# Allegro board FSCV_V2.brd
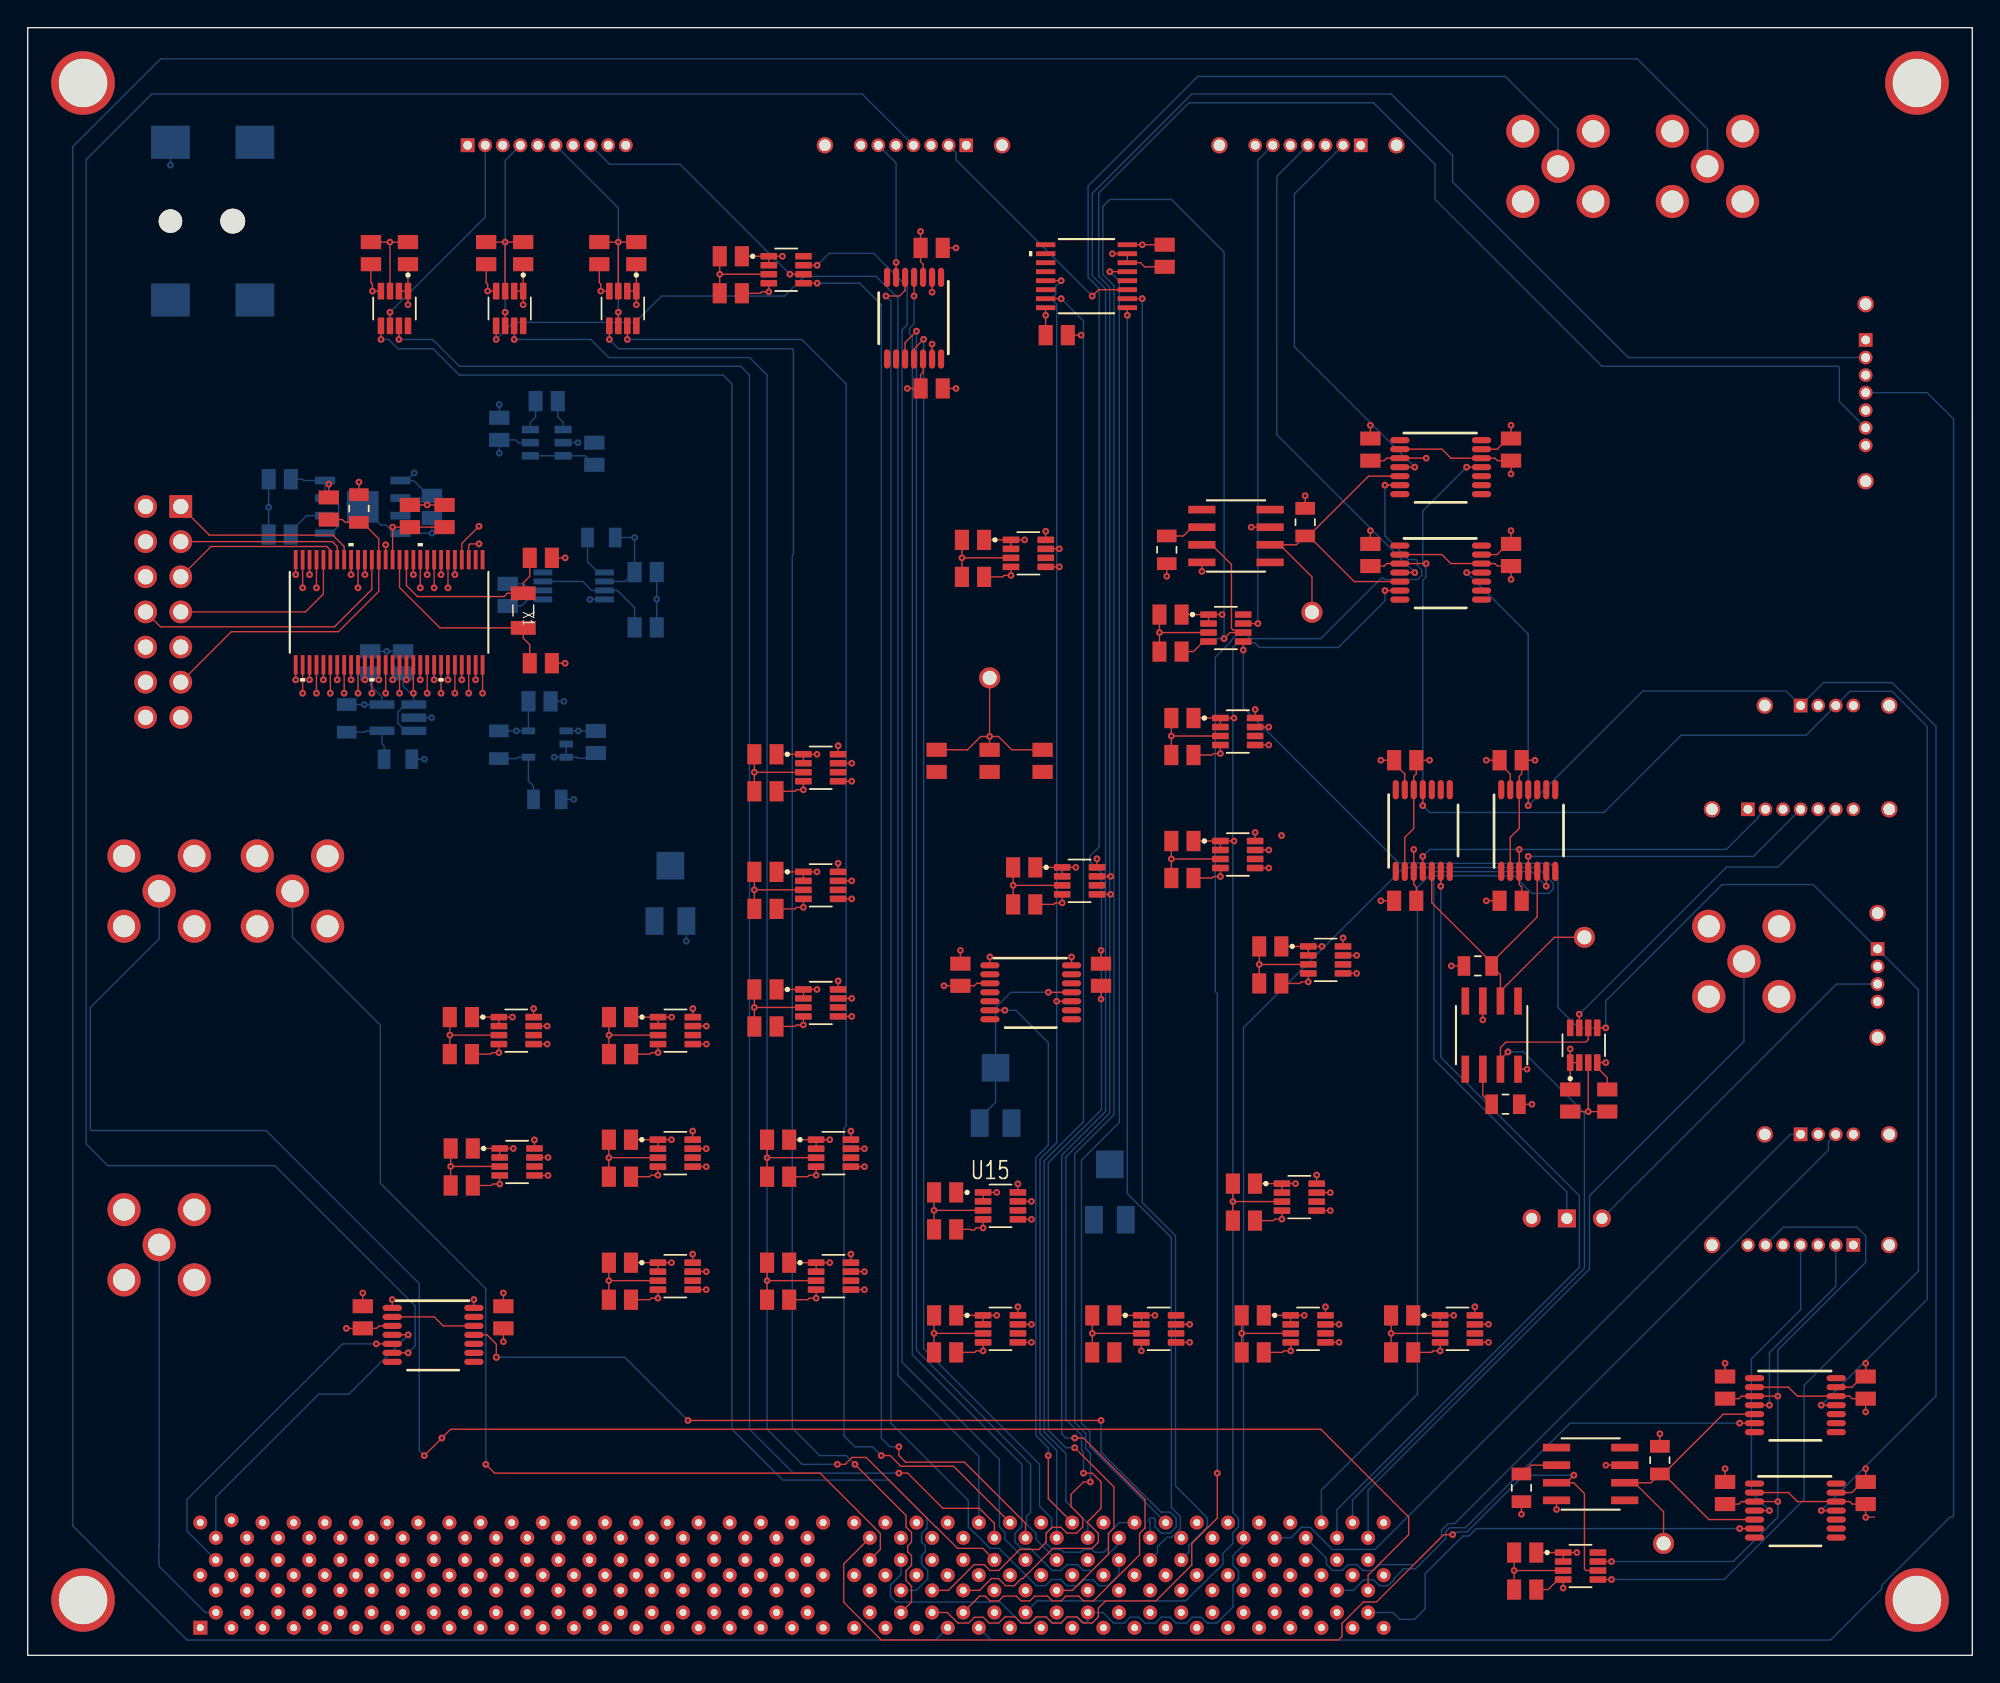
[diagram p0: board, top side]
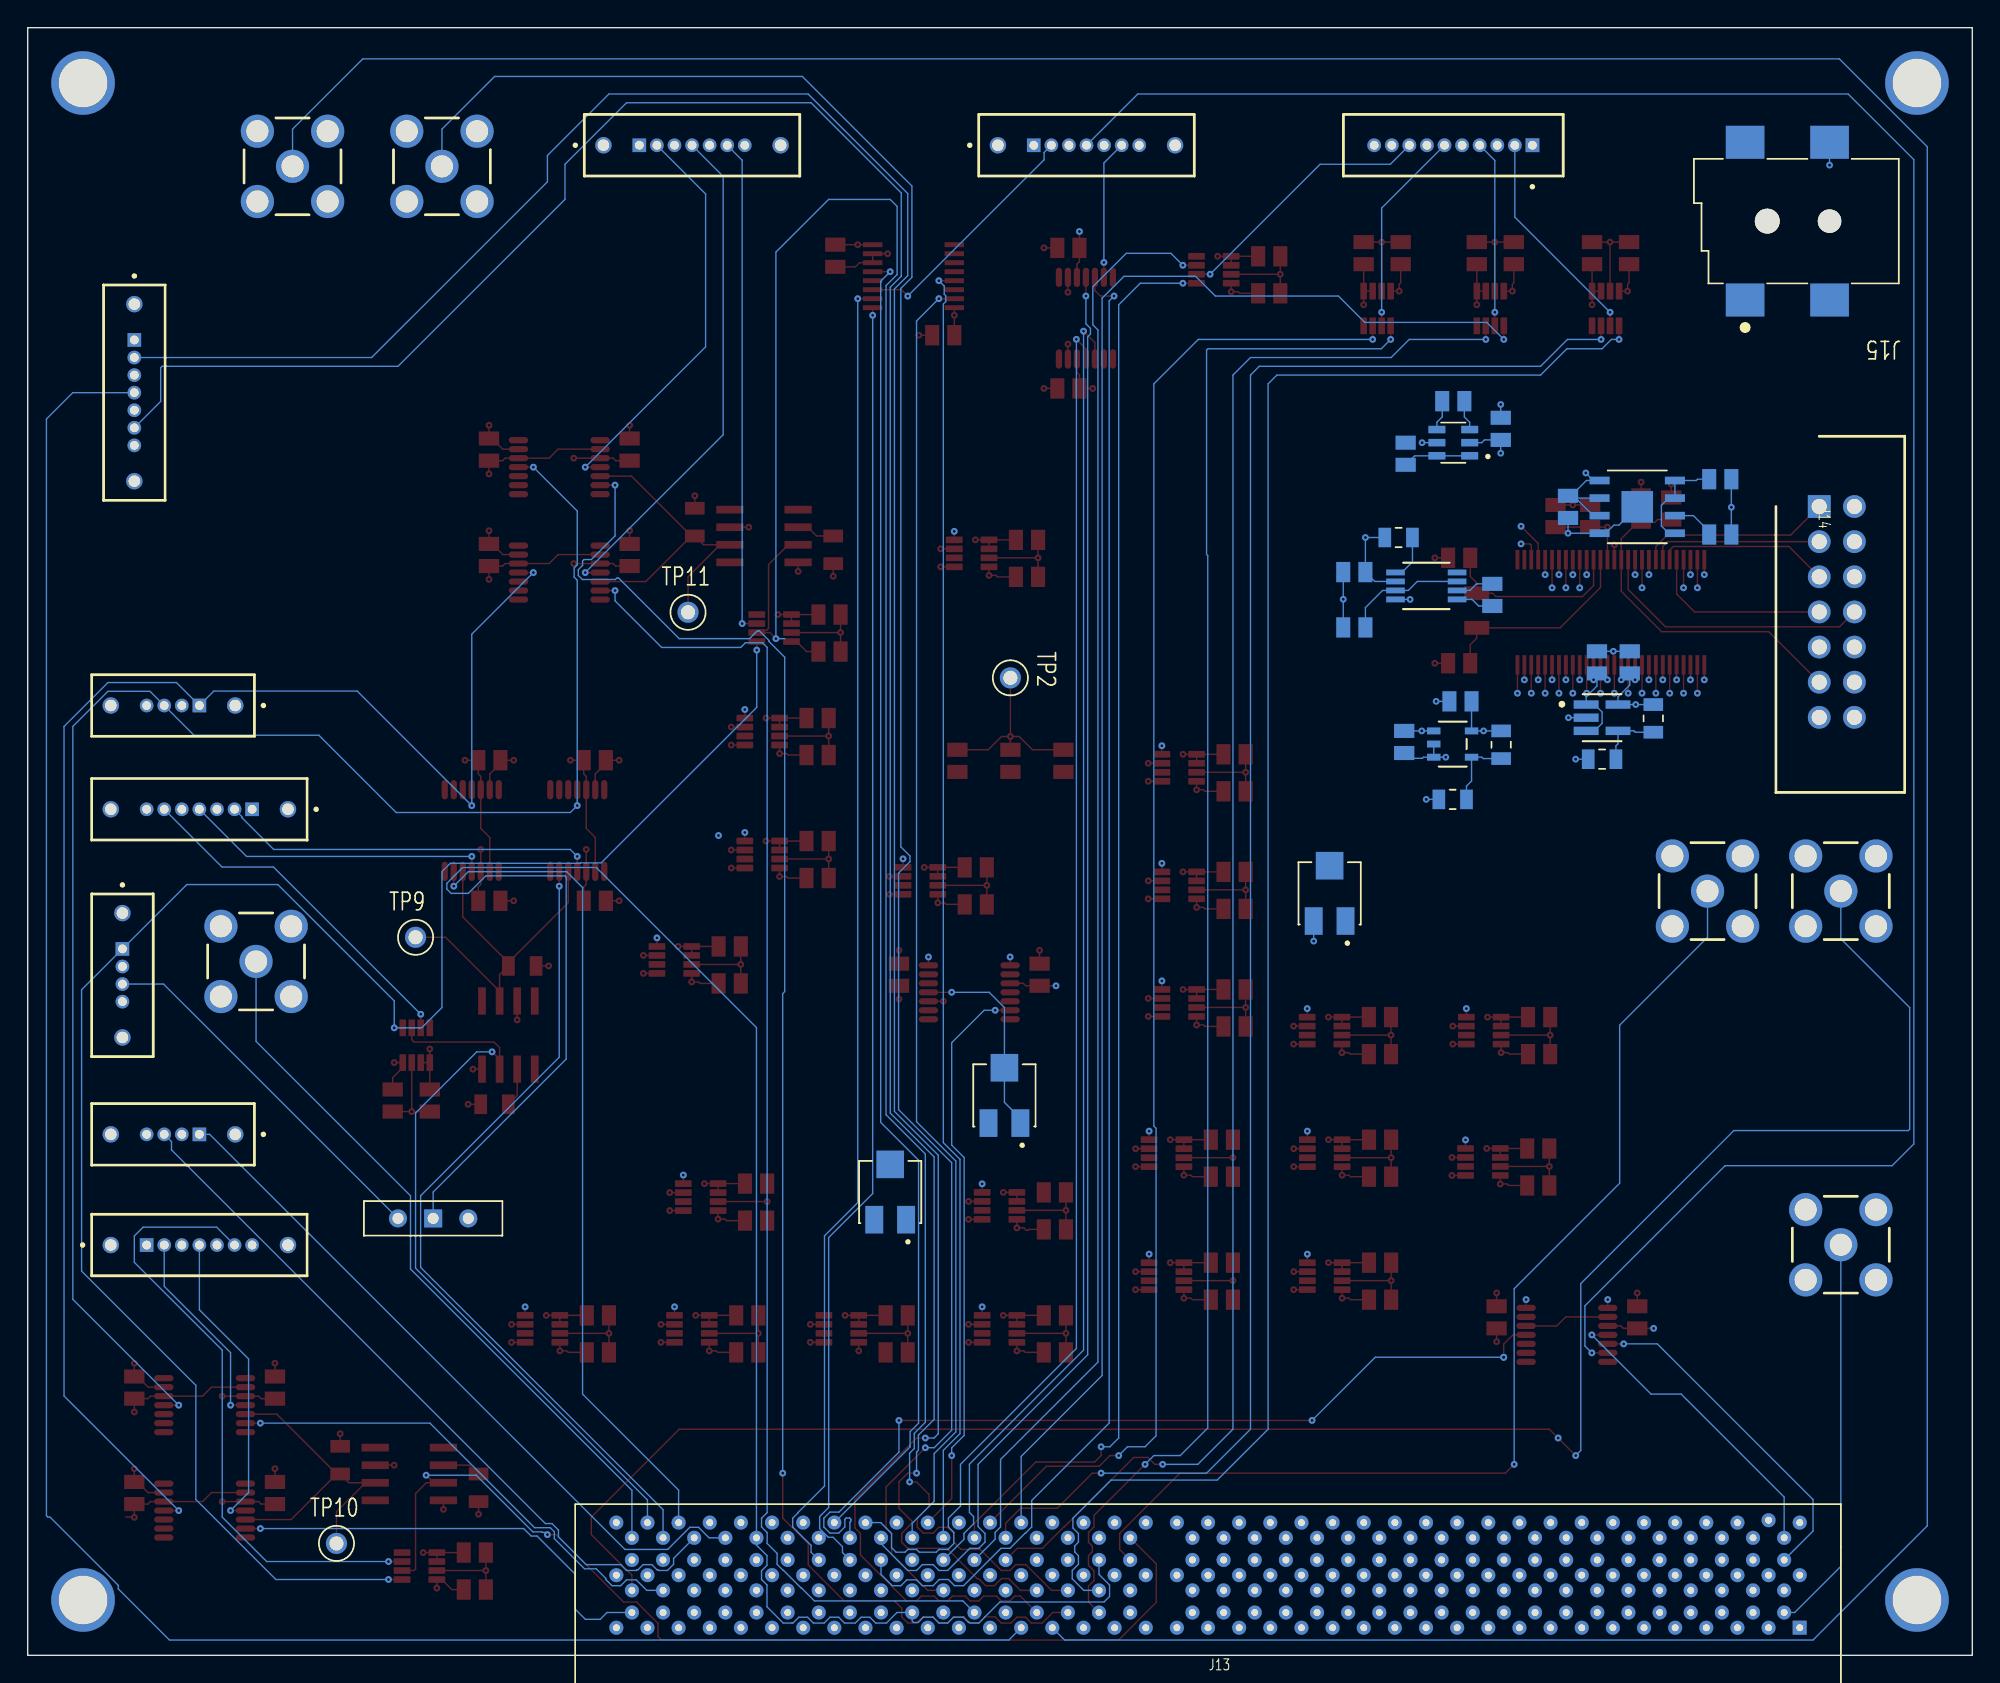
[diagram p1: board, bottom side, seen from below]

Outline 140.5 x 117.66 mm; copper layers: TOP, GND, TRACE, BOTTOM. Coordinates in mm from the lower left corner of the outline.
Outline path: rectangle 0,0 140.5,117.66

## Design rules (mm)
constraint set DEFAULT: min track width 0.127
net group ANALOG: nets SNFET_2_VD SNFET_4_VD SNFET_SHARED_VS VRPS_D
net group DIGITAL: nets CH_EN_1 CH_EN_2 CH_EN_5 CH_EN_D COND_EN_1 COND_EN_2 COND_EN_5 COND_EN_D HP_BYPASS_EN_1 HP_BYPASS_EN_2 HP_BYPASS_EN_5 HP_BYPASS_EN_D IREF_EN_12 IREF_EN_56 IREF_EN_D IREF_TEST_12 IREF_TEST_56 IREF_TEST_D TEST_EN_D VDD_12 VDD_56 VDD_D
net group MCU: nets RST TCK TDI TDO TEST TMS XIN XOUT
net group MISC: nets N162422
net group POWER: nets 3.3V +1.65V +5V -1.65V -5V
nets with their own width: min track width 0.1; nets 5V_UNREGULATED CM_EXT

## Placement (name value [footprint] x y rotation side)
C4  1.1n  [CAP0805]  21.75 82.9 270 top
C7  12p  [CAP0805]  37.07 79.34 0 top
C8  12p  [CAP0805]  37.07 71.72 0 top
C15  0.1u  [CAP0805]  53.3 56.63 180 top
C16  0.1u  [CAP0805]  53.3 53.96 0 top
C17  0.1u  [CAP0805]  88.51 24.57 180 top
C18  0.1u  [CAP0805]  88.51 21.9 0 top
C19  0.1u  [CAP0805]  54.22 37.28 180 top
C20  0.1u  [CAP0805]  54.22 34.6 0 top
C21  2.2u  [CAP0805]  18.21 85.02 180 bottom
C22  2.2u  [CAP0805]  29.21 83.02 270 bottom
C23  2.2u  [CAP0805]  18.21 81.02 180 bottom
C24  10u  [CAP0805]  44.65 74.31 0 bottom
C25  10u  [CAP0805]  44.65 78.31 0 bottom
C26  1u  [CAP0805]  34.68 76.66 270 bottom
C27  10u  [CAP0805]  40.94 86.86 90 bottom
C28  10u  [CAP0805]  34.07 88.66 90 bottom
C29  1u  [CAP0805]  37.5 90.66 0 bottom
C30  0.1u  [CAP0805]  83.43 58.87 180 top
C31  0.1u  [CAP0805]  83.43 56.19 0 top
C32  0.1u  [CAP0805]  83.43 67.75 180 top
C33  0.1u  [CAP0805]  83.43 65.08 0 top
C34  0.1u  [CAP0805]  31.36 36.64 180 top
C35  0.1u  [CAP0805]  31.36 33.97 0 top
C36  0.1u  [CAP0805]  54.22 28.38 180 top
C37  0.1u  [CAP0805]  54.22 25.71 0 top
C38  0.1u  [CAP0805]  89.78 51.25 180 top
C39  0.1u  [CAP0805]  89.78 48.57 0 top
C40  0.1u  [CAP0805]  87.88 34.1 180 top
C41  0.1u  [CAP0805]  87.88 31.42 0 top
C42  0.1u  [CAP0805]  68.3 80.63 180 top
C43  0.1u  [CAP0805]  68.3 77.96 0 top
C44  0.1u  [CAP0805]  53.3 48.13 180 top
C45  0.1u  [CAP0805]  53.3 45.46 0 top
C46  0.1u  [CAP0805]  66.29 33.47 180 top
C47  0.1u  [CAP0805]  66.29 30.79 0 top
C48  0.1u  [CAP0805]  53.3 65.13 180 top
C49  0.1u  [CAP0805]  53.3 62.46 0 top
C50  0.1u  [CAP0805]  99.31 24.57 180 top
C51  0.1u  [CAP0805]  99.31 21.9 0 top
C52  0.1u  [CAP0805]  72 56.96 180 top
C53  0.1u  [CAP0805]  72 54.28 0 top
C54  0.1u  [CAP0805]  66.29 24.57 180 top
C55  0.1u  [CAP0805]  66.29 21.9 0 top
C56  0.1u  [CAP0805]  42.79 28.38 180 top
C57  0.1u  [CAP0805]  42.79 25.71 0 top
C58  0.1u  [CAP0805]  42.79 37.28 180 top
C59  0.1u  [CAP0805]  42.79 34.6 0 top
C60  0.1u  [CAP0805]  77.71 24.57 180 top
C61  0.1u  [CAP0805]  77.71 21.9 0 top
C62  0.1u  [CAP0805]  42.8 46.13 180 top
C63  0.1u  [CAP0805]  42.8 43.46 0 top
C64  0.1u  [CAP0805]  31.3 46.13 180 top
C65  0.1u  [CAP0805]  31.3 43.46 0 top
C66  0.1u  [CAP0805]  111.45 40.1 270 top
C67  0.1u  [CAP0805]  114.12 40.1 90 top
C68  0.1u  [CAP0805]  99.52 54.54 180 top
C69  0.1u  [CAP0805]  99.52 64.7 0 top
C70  0.1u  [CAP0805]  107.14 64.7 0 top
C71  0.1u  [CAP0805]  107.14 54.54 180 top
C72  0.1u  [CAP0805]  132.8 19.35 270 top
C73  0.1u  [CAP0805]  122.63 19.35 90 top
C74  0.1u  [CAP0805]  132.8 11.73 270 top
C75  0.1u  [CAP0805]  108.19 7.43 180 top
C76  0.1u  [CAP0805]  108.19 4.75 0 top
C77  0.1u  [CAP0805]  122.63 11.73 90 top
C78  0.1u  [CAP0805]  107.17 87.16 270 top
C79  0.1u  [CAP0805]  97.01 87.16 90 top
C80  0.1u  [CAP0805]  107.17 79.54 270 top
C81  0.1u  [CAP0805]  82.57 75.23 180 top
C82  0.1u  [CAP0805]  82.57 72.56 0 top
C83  0.1u  [CAP0805]  97.01 79.54 90 top
C84  0.1u  [CAP0805]  34.37 24.44 270 top
C85  0.1u  [CAP0805]  24.21 24.44 90 top
C86  0.1u  [CAP0805]  65.31 91.58 180 top
C87  0.1u  [CAP0805]  65.31 101.74 0 top
C88  0.1u  [CAP0805]  74.35 95.43 180 top
C89  0.1u  [CAP0805]  82.15 101.17 90 top
C90  0.1u  [CAP0805]  27.47 101.36 90 top
C91  0.1u  [CAP0805]  24.8 101.36 270 top
C92  0.1u  [CAP0805]  35.8 101.36 90 top
C93  0.1u  [CAP0805]  33.12 101.36 270 top
C94  0.1u  [CAP0805]  43.97 101.36 90 top
C95  0.1u  [CAP0805]  41.3 101.36 270 top
C96  0.1u  [CAP0805]  50.8 101.13 180 top
C97  0.1u  [CAP0805]  50.8 98.46 0 top
C98  10u  [CAP0805]  27.12 71.78 90 bottom
C99  10u  [CAP0805]  24.75 71.78 90 bottom
C100  0.1u  [CAP0805]  77.55 49.2 270 top
C101  0.1u  [CAP0805]  67.39 49.2 90 top
C104  10u  [CAP0805]  27.62 82.36 90 top
C105  100n  [CAP0805]  30.12 82.36 90 top
C108  1u  [CAP0805]  36.98 68.96 0 bottom
C109  1u  [CAP0805]  41.05 66.03 90 bottom
J1  Connec-4  [SAMTEC_TFM-104-01-L-S-WT]  130 37.66 180 bottom
J5  Connec-7  [SAMTEC_TFM-107-01-S-S-WT]  128.1 61.16 180 bottom
J6  Connec-7  [SAMTEC_TFM-107-01-S-S-WT]  128.1 29.66 0 bottom
J7  Connec-7  [SAMTEC_TFM-107-01-S-S-WT]  92.5 109.16 0 bottom
J8  Connec-4  [SAMTEC_TFM-104-01-L-S-WT]  130 68.66 180 bottom
J9  Connec-4  [SAMTEC_TFM-104-01-L-S-WT]  133.65 49.16 90 bottom
J10  Connec-7  [SAMTEC_TFM-107-01-S-S-WT]  64 109.16 0 bottom
J11  Connec-10  [SAMTEC_TFM-110-01-X-S]  37.5 109.16 180 bottom
J12  Connec-7  [SAMTEC_TFM-107-01-S-S-WT]  132.8 91.28 90 bottom
J13  76291-0226  [762910226]  12.47 2 180 bottom
J14  JTAG  [SHDR14W64P254_2X7_2540X905X920P]  11.06 83.04 270 bottom
J15  PJ-002AH-SMT-TR  [CUI_PJ-002AH-SMT-TR]  13.41 103.97 0 bottom
J16  SMA-J-P-X-ST-TH1  [SAMTEC_SMA-J-P-X-ST-TH1]  124 50.16 180 bottom
J17  SMA-J-P-X-ST-TH1  [SAMTEC_SMA-J-P-X-ST-TH1]  9.5 55.24 180 bottom
J18  SMA-J-P-X-ST-TH1  [SAMTEC_SMA-J-P-X-ST-TH1]  9.5 29.68 180 bottom
J19  SMA-J-P-X-ST-TH1  [SAMTEC_SMA-J-P-X-ST-TH1]  19.13 55.24 180 bottom
J20  SMA-J-P-X-ST-TH1  [SAMTEC_SMA-J-P-X-ST-TH1]  110.57 107.63 180 bottom
J21  SMA-J-P-X-ST-TH1  [SAMTEC_SMA-J-P-X-ST-TH1]  121.37 107.63 180 bottom
NOREF  -  [unnamed]  4 4 0 top
NOREF#2  -  [unnamed]  136.5 113.66 0 top
NOREF#3  -  [unnamed]  136.5 4 0 top
NOREF#4  -  [unnamed]  4 113.66 0 top
R4  100k  [CAP0805]  73.33 64.66 90 top
R5  100k  [CAP0805]  65.67 64.66 90 top
R6  100k  [CAP0805]  69.5 64.66 90 top
R7  47k  [RES0805]  23.93 82.9 270 top
R9  100k  [RES0805]  41.45 80.81 0 bottom
R10  100k  [RES0805]  106.77 39.84 180 top
R11  100k  [RES0805]  104.77 49.84 0 top
R12  100k  [RES0805]  117.93 14.11 270 top
R13  100k  [RES0805]  107.93 12.11 90 top
R14  100k  [RES0805]  92.3 81.91 270 top
R15  100k  [RES0805]  82.3 79.91 90 top
R16  180k  [RES0805]  23.05 67.73 90 bottom
R17  480k  [RES0805]  26.75 64.78 180 bottom
R18  100k  [RES0805]  34.04 65.82 90 bottom
R19  32k  [RES0805]  37.54 61.88 180 bottom
SW1  MSS-102559-14A-D  [SW_MSS-102559-14A-D]  111.2 31.59 0 bottom
TP2  5000  [KEYSTONE_5000]  69.5 70.66 270 bottom
TP9  5000  [KEYSTONE_5000]  112.48 51.91 180 bottom
TP10  5000  [KEYSTONE_5000]  118.19 8.09 180 bottom
TP11  5000  [KEYSTONE_5000]  92.79 75.4 180 bottom
U2  TMUX6104PW  [PW0014A_N]  72.47 47.93 0 top
U3  ADP7118ARDZ-3.3  [RD-8-1_ADI]  24.21 83.02 180 bottom
U4  LTC1751  [MSOP-8_MS_LIT]  39.45 77.31 180 bottom
U5  LTC1983  [SOT95P280X100-6N]  37.5 87.66 0 bottom
U6  TPS784-Q1DBV  [DBV0005A_IPC_A]  26.75 67.78 180 bottom
U7  MAX1735  [21-0057F_MXM]  37.54 65.88 180 bottom
U8  TMUX4051-Q1_PWDYY  [TSSOP16_PW_TEX]  76.5 99.69 180 top
U9  TMUX6104PW  [PW0014A_N]  29.29 23.16 0 top
U10  TMUX6104PW  [PW0014A_N]  64.04 96.66 270 top
U11  TMUX6119DCNR  [SOT65P280X145-8N]  26.5 97.36 270 top
U12  TMUX6119DCNR  [SOT65P280X145-8N]  34.82 97.36 270 top
U13  TMUX6119DCNR  [SOT65P280X145-8N]  43 97.36 270 top
U14  TMUX6119DCNR  [SOT65P280X145-8N]  54.8 100.16 0 top
U15  TMUX6119DCNR  [SOT65P280X145-8N]  70.29 32.49 0 top
U16  TMUX6119DCNR  [SOT65P280X145-8N]  57.3 64.16 0 top
U17  TMUX6119DCNR  [SOT65P280X145-8N]  103.31 23.6 0 top
U18  TMUX6119DCNR  [SOT65P280X145-8N]  76 55.98 0 top
U19  TMUX6119DCNR  [SOT65P280X145-8N]  93.78 50.27 0 top
U20  TMUX6119DCNR  [SOT65P280X145-8N]  91.88 33.12 0 top
U21  TMUX6119DCNR  [SOT65P280X145-8N]  72.3 79.66 0 top
U22  TMUX6119DCNR  [SOT65P280X145-8N]  57.3 47.16 0 top
U23  TMUX6119DCNR  [SOT65P280X145-8N]  87.43 57.89 0 top
U24  TMUX6119DCNR  [SOT65P280X145-8N]  87.43 66.78 0 top
U25  TMUX6119DCNR  [SOT65P280X145-8N]  35.36 35.66 0 top
U26  TMUX6119DCNR  [SOT65P280X145-8N]  58.22 27.41 0 top
U27  TMUX6119DCNR  [SOT65P280X145-8N]  57.3 55.66 0 top
U28  TMUX6119DCNR  [SOT65P280X145-8N]  92.51 23.6 0 top
U29  TMUX6119DCNR  [SOT65P280X145-8N]  58.22 36.3 0 top
U30  TMUX6119DCNR  [SOT65P280X145-8N]  70.29 23.6 0 top
U31  TMUX6119DCNR  [SOT65P280X145-8N]  46.79 27.41 0 top
U32  TMUX6119DCNR  [SOT65P280X145-8N]  46.79 36.3 0 top
U33  TMUX6119DCNR  [SOT65P280X145-8N]  81.71 23.6 0 top
U34  TMUX6119DCNR  [SOT65P280X145-8N]  46.8 45.16 0 top
U35  TMUX6119DCNR  [SOT65P280X145-8N]  35.3 45.16 0 top
U36  ADA4610-1  [R_8_ADI]  105.77 44.84 90 top
U37  TMUX6119DCNR  [SOT65P280X145-8N]  112.43 44.1 90 top
U38  TMUX6104PW  [PW0014A_N]  100.8 59.62 90 top
U39  TMUX6104PW  [PW0014A_N]  108.42 59.62 90 top
U40  ADA4610-1  [R_8_ADI]  112.93 13.11 0 top
U41  TMUX6119DCNR  [SOT65P280X145-8N]  112.19 6.45 0 top
U42  TMUX6104PW  [PW0014A_N]  127.71 18.09 0 top
U43  TMUX6104PW  [PW0014A_N]  127.71 10.47 0 top
U44  ADA4610-1  [R_8_ADI]  87.3 80.91 0 top
U45  TMUX6119DCNR  [SOT65P280X145-8N]  86.57 74.26 0 top
U46  TMUX6104PW  [PW0014A_N]  102.09 85.89 0 top
U47  TMUX6104PW  [PW0014A_N]  102.09 78.27 0 top
U48  MSP430FR4132IG56  [DGG56_TEX]  26.12 75.4 270 top
VR3  3314J-1-754E  [TRIM_3314J-1-754E]  78.19 33.49 180 bottom
VR4  3314J-1-754E  [TRIM_3314J-1-754E]  46.44 55.08 180 bottom
VR5  3314J-1-754E  [TRIM_3314J-1-754E]  69.93 40.47 180 bottom
X1  Crystal  [FC135R327680KAA3]  35.81 75.53 270 top

## Library data of the parts
C4 C7 C8 C15-C101 C104 C105 C108 C109 = C
J1 J8 J9 = Connec-4
J5-J7 J10 J12 = Connec-7
J11 = Connec-10
J13 = Edge_conn_76291-0226
J14 = JTAG_87831-1420
J15 = Power_Jack_PJ-002AH-SMT-TR
J16-J21 = SMA-J-P-X-ST-TH1
R4-R7 R9-R19 = R
SW1 = Switch_1P2T_MSS-102559-14A-D
TP2 TP9-TP11 = TP
U2 U9 U10 U38 U39 U42 U43 U46 U47 = TMUX6104PWR
U3 = Volt_Reg_ADP7118ARDZ-3.3: User Part Number: PN
U4 = LTC1751EMS8-5
U5 = LTC1983ES6-5
U6 = TPS78401QDBVRQ1
U7 = MAX1735EUK25T
U8 = TMUX4051PWRQ1
U11-U35 U37 U41 U45 = TMUX6119DCNR
U36 U40 U44 = ADA4610-1ARJZ-R2
U48 = MSP430FR4132IG56
VR3-VR5 = 3314J-1-754E
X1 = Crystal

## Footprints (pads in the part's own frame, mm; a bottom-side part is the same pattern mirrored in y, then rotated)
21-0057F_MXM
  rect 0.978x0.508 smd: 1(-1.365,0.95) 2(-1.365,0) 3(-1.365,-0.95) 4(1.365,-0.95) 5(1.365,0.95)
762910226
  round 0 hole 2.08 unplated: (-87.2,1.9) (1.7,5.32)
  rect 1.02x1.02 hole 0.51: 1(0,0)
  round 1.02 hole 0.51: 2(-1.125,1.1) 3(-1.125,2.7) 4(-2.25,0) 5(-3.375,1.1) 6(-3.375,2.7) 7(-4.5,0) 8(-5.625,1.1) 9(-5.625,2.7) 10(-6.75,0) 11(-7.875,1.1) 12(-7.875,2.7) 13(-9,0) 14(-10.125,1.1) 15(-10.125,2.7) 16(-11.25,0) 17(-12.375,1.1) 18(-12.375,2.7) 19(-13.5,0) 20(-14.625,1.1) 21(-14.625,2.7) 22(-15.75,0) 23(-16.875,1.1) 24(-16.875,2.7) 25(-18,0) 26(-19.125,1.1) 27(-19.125,2.7) 28(-20.25,0) 29(-21.375,1.1) 30(-21.375,2.7) 31(-22.5,0) 32(-23.625,1.1) 33(-23.625,2.7) 34(-24.75,0) 35(-25.875,1.1) 36(-25.875,2.7) 37(-27,0) 38(-28.125,1.1) 39(-28.125,2.7) 40(-29.25,0) 41(-30.375,1.1) 42(-30.375,2.7) 43(-31.5,0) 44(-32.625,1.1) 45(-32.625,2.7) 46(-33.75,0) 47(-34.875,1.1) 48(-34.875,2.7) 49(-36,0) 50(-37.125,1.1) 51(-37.125,2.7) 52(-38.25,0) 53(-39.375,1.1) 54(-39.375,2.7) 55(-40.5,0) 56(-41.625,1.1) 57(-41.625,2.7) 58(-42.75,0) 59(-43.875,1.1) 60(-43.875,2.7) 61(-45,0) 62(-47.25,0) 63(-48.375,1.1) 64(-48.375,2.7) 65(-49.5,0) 66(-50.625,1.1) 67(-50.625,2.7) 68(-51.75,0) 69(-52.875,1.1) 70(-52.875,2.7) 71(-54,0) 72(-55.125,1.1) 73(-55.125,2.7) 74(-56.25,0) 75(-57.375,1.1) 76(-57.375,2.7) 77(-58.5,0) 78(-59.625,1.1) 79(-59.625,2.7) 80(-60.75,0) 81(-61.875,1.1) 82(-61.875,2.7) 83(-63,0) 84(-64.125,1.1) 85(-64.125,2.7) 86(-65.25,0) 87(-66.375,1.1) 88(-66.375,2.7) 89(-67.5,0) 90(-68.625,1.1) 91(-68.625,2.7) 92(-69.75,0) 93(-70.875,1.1) 94(-70.875,2.7) 95(-72,0) 96(-73.125,1.1) 97(-73.125,2.7) 98(-74.25,0) 99(-75.375,1.1) 100(-75.375,2.7) 101(-76.5,0) 102(-77.625,1.1) 103(-77.625,2.7) 104(-78.75,0) 105(-79.875,1.1) 106(-79.875,2.7) 107(-81,0) 108(-82.125,1.1) 109(-82.125,2.7) 110(-83.25,0) 111(-84.375,1.1) 112(-84.375,2.7) 113(-85.5,0) 114(-85.5,7.6) 115(-84.375,6.5) 116(-84.375,4.9) 117(-83.25,7.6) 118(-82.125,6.5) 119(-82.125,4.9) 120(-81,7.6) 121(-79.875,6.5) 122(-79.875,4.9) 123(-78.75,7.6) 124(-77.625,6.5) 125(-77.625,4.9) 126(-76.5,7.6) 127(-75.375,6.5) 128(-75.375,4.9) 129(-74.25,7.6) 130(-73.125,6.5) 131(-73.125,4.9) 132(-72,7.6) 133(-70.875,6.5) 134(-70.875,4.9) 135(-69.75,7.6) 136(-68.625,6.5) 137(-68.625,4.9) 138(-67.5,7.6) 139(-66.375,6.5) 140(-66.375,4.9) 141(-65.25,7.6) 142(-64.125,6.5) 143(-64.125,4.9) 144(-63,7.6) 145(-61.875,6.5) 146(-61.875,4.9) 147(-60.75,7.6) 148(-59.625,6.5) 149(-59.625,4.9) 150(-58.5,7.6) 151(-57.375,6.5) 152(-57.375,4.9) 153(-56.25,7.6) 154(-55.125,6.5) 155(-55.125,4.9) 156(-54,7.6) 157(-52.875,6.5) 158(-52.875,4.9) 159(-51.75,7.6) 160(-50.625,6.5) 161(-50.625,4.9) 162(-49.5,7.6) 163(-48.375,6.5) 164(-48.375,4.9) 165(-47.25,7.6) 166(-45,7.6) 167(-43.875,6.5) 168(-43.875,4.9) 169(-42.75,7.6) 170(-41.625,6.5) 171(-41.625,4.9) 172(-40.5,7.6) 173(-39.375,6.5) 174(-39.375,4.9) 175(-38.25,7.6) 176(-37.125,6.5) 177(-37.125,4.9) 178(-36,7.6) 179(-34.875,6.5) 180(-34.875,4.9) 181(-33.75,7.6) 182(-32.625,6.5) 183(-32.625,4.9) 184(-31.5,7.6) 185(-30.375,6.5) 186(-30.375,4.9) 187(-29.25,7.6) 188(-28.125,6.5) 189(-28.125,4.9) 190(-27,7.6) 191(-25.875,6.5) 192(-25.875,4.9) 193(-24.75,7.6) 194(-23.625,6.5) 195(-23.625,4.9) 196(-22.5,7.6) 197(-21.375,6.5) 198(-21.375,4.9) 199(-20.25,7.6) 200(-19.125,6.5) 201(-19.125,4.9) 202(-18,7.6) 203(-16.875,6.5) 204(-16.875,4.9) 205(-15.75,7.6) 206(-14.625,6.5) 207(-14.625,4.9) 208(-13.5,7.6) 209(-12.375,6.5) 210(-12.375,4.9) 211(-11.25,7.6) 212(-10.125,6.5) 213(-10.125,4.9) 214(-9,7.6) 215(-7.875,6.5) 216(-7.875,4.9) 217(-6.75,7.6) 218(-5.625,6.5) 219(-5.625,4.9) 220(-4.5,7.6) 221(-3.375,6.5) 222(-3.375,4.9) 223(-2.25,7.77) 224(-1.125,6.5) 225(-1.125,4.9) 226(0,7.6) A1(0,3.8) A2(-2.25,3.8) A3(-4.5,3.8) A4(-6.75,3.8) A5(-9,3.8) A6(-11.25,3.8) A7(-13.5,3.8) A8(-15.75,3.8) A9(-18,3.8) A10(-20.25,3.8) A11(-22.5,3.8) A12(-24.75,3.8) A13(-27,3.8) A14(-29.25,3.8) A15(-31.5,3.8) A16(-33.75,3.8) A17(-36,3.8) A18(-38.25,3.8) A19(-40.5,3.8) A20(-42.75,3.8) A21(-45,3.8) A22(-47.25,3.8) A23(-49.5,3.8) A24(-51.75,3.8) A25(-54,3.8) A26(-56.25,3.8) A27(-58.5,3.8) A28(-60.75,3.8) A29(-63,3.8) A30(-65.25,3.8) A31(-67.5,3.8) A32(-69.75,3.8) A33(-72,3.8) A34(-74.25,3.8) A35(-76.5,3.8) A36(-78.75,3.8) A37(-81,3.8) A38(-83.25,3.8) A39(-85.5,3.8)
CAP0805
  rect 1.02x1.47 smd: 1(-0.8,0) 2(0.8,0)
CUI_PJ-002AH-SMT-TR
  round 1.7 hole 1.7 unplated: (-3.1,0.3)
  round 1.8 hole 1.8 unplated: (1.4,0.3)
  rect 2.8x2.4 smd: 1A(3,6) 1B(-3.1,6) 2(-3.1,-5.4) 3(3,-5.4)
DBV0005A_IPC_A
  rect 1.805x0.612 smd: 1(-1.151,0.95) 2(-1.151,0) 3(-1.151,-0.95) 4(1.151,-0.95) 5(1.151,0.95)
DGG56_TEX
  rect 1.404x0.279 smd: 1(-3.801,6.75) 2(-3.801,6.25) 3(-3.801,5.75) 4(-3.801,5.25) 5(-3.801,4.75) 6(-3.801,4.25) 7(-3.801,3.75) 8(-3.801,3.25) 9(-3.801,2.75) 10(-3.801,2.25) 11(-3.801,1.75) 12(-3.801,1.25) 13(-3.801,0.75) 14(-3.801,0.25) 15(-3.801,-0.25) 16(-3.801,-0.75) 17(-3.801,-1.25) 18(-3.801,-1.75) 19(-3.801,-2.25) 20(-3.801,-2.75) 21(-3.801,-3.25) 22(-3.801,-3.75) 23(-3.801,-4.25) 24(-3.801,-4.75) 25(-3.801,-5.25) 26(-3.801,-5.75) 27(-3.801,-6.25) 28(-3.801,-6.75) 29(3.801,-6.75) 30(3.801,-6.25) 31(3.801,-5.75) 32(3.801,-5.25) 33(3.801,-4.75) 34(3.801,-4.25) 35(3.801,-3.75) 36(3.801,-3.25) 37(3.801,-2.75) 38(3.801,-2.25) 39(3.801,-1.75) 40(3.801,-1.25) 41(3.801,-0.75) 42(3.801,-0.25) 43(3.801,0.25) 44(3.801,0.75) 45(3.801,1.25) 46(3.801,1.75) 47(3.801,2.25) 48(3.801,2.75) 49(3.801,3.25) 50(3.801,3.75) 51(3.801,4.25) 52(3.801,4.75) 53(3.801,5.25) 54(3.801,5.75) 55(3.801,6.25) 56(3.801,6.75)
FC135R327680KAA3
  rect 1x1.8 smd: 1(-1.25,0) 2(1.25,0)
KEYSTONE_5000
  round 1.53 hole 1.02: TP(0,0)
MSOP-8_MS_LIT
  rect 1.353x0.431 smd: 1(-2.226,0.975) 2(-2.226,0.325) 3(-2.226,-0.325) 4(-2.226,-0.975) 5(2.226,-0.975) 6(2.226,-0.325) 7(2.226,0.325) 8(2.226,0.975)
PW0014A_N
  oval 1.4x0.45 smd: 1(-2.95,1.95) 2(-2.95,1.3) 3(-2.95,0.65) 4(-2.95,0) 5(-2.95,-0.65) 6(-2.95,-1.3) 7(-2.95,-1.95) 8(2.95,-1.95) 9(2.95,-1.3) 10(2.95,-0.65) 11(2.95,0) 12(2.95,0.65) 13(2.95,1.3) 14(2.95,1.95)
R_8_ADI
  rect 1.97x0.558 smd: 1(-2.464,1.905) 2(-2.464,0.635) 3(-2.464,-0.635) 4(-2.464,-1.905) 5(2.464,-1.905) 6(2.464,-0.635) 7(2.464,0.635) 8(2.464,1.905)
RD-8-1_ADI
  rect 1.455x0.558 smd: 1(-2.721,1.905) 2(-2.721,0.635) 3(-2.721,-0.635) 4(-2.721,-1.905) 5(2.721,-1.905) 6(2.721,-0.635) 7(2.721,0.635) 8(2.721,1.905)
  rect 2.286x2.286 smd: 9(0,0)
RES0805
  rect 0.92x1.42 smd: 1(-1,0) 2(1,0)
SAMTEC_SMA-J-P-X-ST-TH1
  round 2.4 hole 1.6: 1(0,0) 2(2.54,-2.54) 3(2.54,2.54) 4(-2.54,2.54) 5(-2.54,-2.54)
SAMTEC_TFM-104-01-L-S-WT
  rect 0.99x0.99 hole 0.64: 01(1.905,0)
  round 0.99 hole 0.64: 02(0.635,0) 03(-0.635,0) 04(-1.905,0)
  round 1.19 hole 0.84: S1(-4.495,0) S2(4.495,0)
SAMTEC_TFM-107-01-S-S-WT
  rect 0.99x0.99 hole 0.64: 01(3.81,0)
  round 0.99 hole 0.64: 02(2.54,0) 03(1.27,0) 04(0,0) 05(-1.27,0) 06(-2.54,0) 07(-3.81,0)
  round 1.19 hole 0.84: S1(-6.4,0) S2(6.4,0)
SAMTEC_TFM-110-01-X-S
  rect 1x1 hole 0.64: 01(5.715,0)
  round 1 hole 0.64: 02(4.445,0) 03(3.175,0) 04(1.905,0) 05(0.635,0) 06(-0.635,0) 07(-1.905,0) 08(-3.175,0) 09(-4.445,0) 10(-5.715,0)
SHDR14W64P254_2X7_2540X905X920P
  rect 1.65x1.65 hole 1.1: 1(0,0)
  round 1.65 hole 1.1: 2(0,2.54) 3(2.54,0) 4(2.54,2.54) 5(5.08,0) 6(5.08,2.54) 7(7.62,0) 8(7.62,2.54) 9(10.16,0) 10(10.16,2.54) 11(12.7,0) 12(12.7,2.54) 13(15.24,0) 14(15.24,2.54)
SOT65P280X145-8N
  custom 1.21x0.48 smd: 1(-1.255,0.975) 2(-1.255,0.325) 3(-1.255,-0.325) 4(-1.255,-0.975) 5(1.255,-0.975) 6(1.255,-0.325) 7(1.255,0.325) 8(1.255,0.975)
SOT95P280X100-6N
  custom 1.24x0.55 smd: 1(-1.185,0.95) 2(-1.185,0) 3(-1.185,-0.95) 4(1.185,-0.95) 5(1.185,0) 6(1.185,0.95)
SW_MSS-102559-14A-D
  rect 1.308x1.308 hole 0.8: 1(0,0)
  round 1.308 hole 0.8: 2(-2.54,0) 3(2.54,0)
TRIM_3314J-1-754E
  rect 1.3x2 smd: 1(1.15,-2) 3(-1.15,-2)
  rect 2x2 smd: 2(0,2)
TSSOP16_PW_TEX
  rect 1.404x0.355 smd: 1(-2.95,2.275) 2(-2.95,1.625) 3(-2.95,0.975) 4(-2.95,0.325) 5(-2.95,-0.325) 6(-2.95,-0.975) 7(-2.95,-1.625) 8(-2.95,-2.275) 9(2.95,-2.275) 10(2.95,-1.625) 11(2.95,-0.975) 12(2.95,-0.325) 13(2.95,0.325) 14(2.95,0.975) 15(2.95,1.625) 16(2.95,2.275)
unnamed
  round 4.6 hole 3.5: (0,0)

## Nets
3.3V: C22.1 C104.2 C105.2 J14.4 R7.1 U3.1 U3.2(VOUT_2) U3.3 U48.15
5V_UNREGULATED: C21.1 C24.1 C27.1 C98.1 J15.1A J15.1B U3.5 U3.7 U3.8 U4.3 U4.7 U5.1 U5.6 U6.1 U6.3
+1.65V: C99.1 R16.2 U2.10 U6.5(OUT) U15.5 U16.5 U17.5 U18.5 U19.5 U20.5 U21.5 U22.5 U23.5 U24.5 U25.5 U26.5 U27.5 U28.5 U29.5 U30.5 U31.5 U32.5 U33.5 U34.5 U35.5
+5V: C15.1 C17.1 C19.1 C25.1 C30.1 C32.1 C34.1 C36.1 C38.1 C40.1 C42.1 C44.1 C46.1 C48.1 C50.1 C52.1 C54.1 C56.1 C58.1 C60.1 C62.1 C64.1 C66.1 C69.2 C70.2 C72.2 C74.2 C75.1 C78.2 C80.2 C81.1 C84.2 C86.2 C88.2 C90.1 C92.1 C94.1 C96.1 C100.2 R9.2 U2.2 U2.12 U4.2(VOUT) U8.16 U9.2 U9.12 U10.2 U10.12 U11.1 U11.2 U12.1 U12.2 U13.1 U13.2 U14.1 U14.2 U15.1 U15.2 U16.1 U16.2 U17.1 U17.2 U18.1 U18.2 U19.1 U19.2 U20.1 U20.2 U21.1 U21.2 U22.1 U22.2 U23.1 U23.2 U24.1 U24.2 U25.1 U25.2 U26.1 U26.2 U27.1 U27.2 U28.1 U28.2 U29.1 U29.2 U30.1 U30.2 U31.1 U31.2 U32.1 U32.2 U33.1 U33.2 U34.1 U34.2 U35.1 U35.2 U36.7 U37.1 U37.2 U38.2 U38.12 U39.2 U39.12 U40.7 U41.1 U41.2 U42.2 U42.12 U43.2 U43.12 U44.7 U45.1 U45.2 U46.2 U46.12 U47.2 U47.12
-1.65V: C108.1 J13.9 J13.25 J13.64 J13.97 J13.125 J13.143 J13.162 J13.218(VSS_7) R4.2 R5.2 R6.2 R18.2 TP2.TP U7.5 U15.7 U16.7 U17.7 U18.7 U19.7 U20.7 U21.7 U22.7 U23.7 U24.7 U25.7 U26.7 U27.7 U28.7 U29.7 U30.7 U31.7 U32.7 U33.7 U34.7 U35.7 VR3.3 VR4.3 VR5.3
-5V: C16.2 C18.2 C20.2 C28.1 C31.2 C33.2 C35.2 C37.2 C39.2 C41.2 C43.2 C45.2 C47.2 C49.2 C51.2 C53.2 C55.2 C57.2 C59.2 C61.2 C63.2 C65.2 C67.2 C68.1 C71.1 C73.1 C76.2 C77.1 C79.1 C82.2 C83.1 C85.1 C87.1 C89.1 C91.2 C93.2 C95.2 C97.2 C101.1 C109.1 U2.3(VSS) U5.2(VOUT) U7.2 U7.3 U8.6 U8.7(VSS) U9.3(VSS) U10.3(VSS) U11.4(VSS) U12.4(VSS) U13.4(VSS) U14.4(VSS) U15.4(VSS) U16.4(VSS) U17.4(VSS) U18.4(VSS) U19.4(VSS) U20.4(VSS) U21.4(VSS) U22.4(VSS) U23.4(VSS) U24.4(VSS) U25.4(VSS) U26.4(VSS) U27.4(VSS) U28.4(VSS) U29.4(VSS) U30.4(VSS) U31.4(VSS) U32.4(VSS) U33.4(VSS) U34.4(VSS) U35.4(VSS) U36.4(V-) U37.4(VSS) U38.3(VSS) U39.3(VSS) U40.4(V-) U41.4(VSS) U42.3(VSS) U43.3(VSS) U44.4(V-) U45.4(VSS) U46.3(VSS) U47.3(VSS)
GND: C4.1 C7.2 C8.2 C15.2 C16.1 C17.2 C18.1 C19.2 C20.1 C21.2 C22.2 C23.2 C24.2 C25.2 C27.2 C28.2 C30.2 C31.1 C32.2 C33.1 C34.2 C35.1 C36.2 C37.1 C38.2 C39.1 C40.2 C41.1 C42.2 C43.1 C44.2 C45.1 C46.2 C47.1 C48.2 C49.1 C50.2 C51.1 C52.2 C53.1 C54.2 C55.1 C56.2 C57.1 C58.2 C59.1 C60.2 C61.1 C62.2 C63.1 C64.2 C65.1 C66.2 C67.1 C68.2 C69.1 C70.1 C71.2 C72.1 C73.2 C74.1 C75.2 C76.1 C77.2 C78.1 C79.2 C80.1 C81.2 C82.1 C83.2 C84.1 C85.2 C86.1 C87.2 C88.1 C89.2 C90.2 C91.1 C92.2 C93.1 C94.2 C95.1 C96.2 C97.1 C98.2 C99.2 C100.1 C101.2 C104.1 C105.1 C108.2 C109.2 J1.02 J1.04 J5.01 J5.03 J5.05 J5.07 J6.01 J6.03 J6.05 J6.07 J7.01 J7.03 J7.05 J7.07 J8.02 J8.04 J9.02 J9.04 J10.01 J10.03 J10.05 J10.07 J11.01 J11.03 J11.05 J11.07 J11.09(9) J11.10 J12.01 J12.03 J12.05 J12.07 J14.9 J15.2 J15.3 J16.2 J16.3 J16.4 J16.5 J17.2 J17.3 J17.4 J17.5 J18.2 J18.3 J18.4 J18.5 J19.2 J19.3 J19.4 J19.5 J20.2 J20.3 J20.4 J20.5 J21.2 J21.3 J21.4 J21.5 R10.1 R11.1 R12.1 R13.1 R14.1 R15.1 R17.1 R19.1 SW1.2 U2.13 U3.4 U3.9 U4.4 U5.5 U6.2 U7.1 U8.8 U9.13 U10.13 U11.3 U12.3 U13.3 U14.3 U15.3 U16.3 U17.3 U18.3 U19.3 U20.3 U21.3 U22.3 U23.3 U24.3 U25.3 U26.3 U27.3 U28.3 U29.3 U30.3 U31.3 U32.3 U33.3 U34.3 U35.3 U37.3 U38.13 U39.13 U41.3 U42.13 U43.13 U45.3 U46.13 U47.13 U48.14
VDD_12: J13.126 U27.6
VDD_56: J13.108 U28.6
VDD_D: J13.80 U29.6
BOTTOM_PLANE: J13.144 U2.6
CH_EN_1: J13.123 U23.6
CH_EN_1_SEL: U23.8 U48.53
CH_EN_2: J13.114 U24.6
CH_EN_2_SEL: U24.8 U48.54
CH_EN_5: J13.165 U25.6
CH_EN_5_SEL: U25.8 U48.55
CH_EN_D: J13.83 U26.6
CH_EN_D_SEL: U26.8 U48.56
CH_OUTPUT_1: J1.01 J13.124
CH_OUTPUT_2: J13.2 J18.1
CH_OUTPUT_5: J13.164 J19.1
CH_OUTPUT_D: J13.71 J21.1
CM: J13.84 J13.127 J13.161 SW1.1
CM_EXT: J9.03 SW1.3
COND_EN_1: J13.119 U19.6
COND_EN_1_SEL: U19.8 U48.49
COND_EN_2: J13.116 U20.6
COND_EN_2_SEL: U20.8 U48.50
COND_EN_5: J13.110 U21.6
COND_EN_5_SEL: U21.8 U48.51
COND_EN_D: J13.76 U22.6
COND_EN_D_SEL: U22.8 U48.52
DIFF_NFET_1_SHARED_VB: J13.152 U12.7
DIFF_NFET_1_SHARED_VD: J13.149 U14.7
DIFF_NFET_1_VSN: J13.150 U13.7
DIFF_NFET_1_VSP: J13.151 U11.7
DIFF_NFET_2_SHARED_VB: J13.153 U12.5
DIFF_NFET_2_SHARED_VD: J13.148 U14.5
DIFF_NFET_2_VSN: J13.66 U13.5
DIFF_NFET_2_VSP: J13.67 U11.5
HP_BYPASS_EN_1: J13.122 U15.6
HP_BYPASS_EN_1_SEL: U15.8 U48.45
HP_BYPASS_EN_2: U2.4 U16.6
HP_BYPASS_EN_2_SEL: U16.8 U48.46
HP_BYPASS_EN_5: J13.113 U17.6
HP_BYPASS_EN_5_SEL: U17.8 U48.47
HP_BYPASS_EN_D: U2.5 U18.6
HP_BYPASS_EN_D_SEL: U18.8 U48.48
HPF_OUT_BUF: J12.02 J13.72
IREF_EN_12: J13.128 U33.6
IREF_EN_12_SEL: U33.8 U48.11
IREF_EN_56: J13.160 U34.6
IREF_EN_56_SEL: U34.8 U48.10
IREF_EN_D: J13.77 U35.6
IREF_EN_D_SEL: U35.8 U48.25
IREF_IBX_12: J13.131 R4.1
IREF_IBX_56: J13.157 R5.1
IREF_IBX_D: J13.79 R6.1
IREF_REXT_12: J13.129 VR3.1 VR3.2(WIPER)
IREF_REXT_56: J13.159 VR4.1 VR4.2(WIPER)
IREF_REXT_D: U2.11 VR5.1 VR5.2(WIPER)
IREF_TEST_12: J13.130 U30.6
IREF_TEST_12_SEL: U30.8 U48.20
IREF_TEST_56: J13.158 U31.6
IREF_TEST_56_SEL: U31.8 U48.19
IREF_TEST_D: J13.81 U32.6
IREF_TEST_D_SEL: U32.8 U48.18
RST: C4.2 J14.11 R7.2 U48.16
SEL1_0: U8.11 U48.40
SEL1_1: U8.10 U48.41
SEL1_2: U8.9 U48.42
SEL2_0: U9.1 U10.1 U48.43
SEL2_1: U9.14 U10.14 U48.44
SEL3: U11.8 U12.8 U13.8 U14.8 U48.33
SEL4_0: U38.1 U48.9
SEL4_1: U38.14 U48.8
SEL5_0: U39.1 U48.7
SEL5_1: U39.14 U48.6
SEL6_0: U42.1 U48.29
SEL6_1: U42.14 U48.30
SEL7_0: U43.1 U48.31
SEL7_1: U43.14 U48.32
SEL8_0: U46.1 U48.36
SEL8_1: U46.14 U48.37
SEL9_0: U47.1 U48.38
SEL9_1: U47.14 U48.39
SEL10: U37.8 U48.5
SEL11: U41.8 U48.34
SEL12: U45.8 U48.35
SEL13: U27.8 U48.28
SEL14: U28.8 U48.27
SEL15: U29.8 U48.26
SEL16_0: U2.1 U48.4
SEL16_1: U2.14 U48.3
SENSOR_1: J1.03 J13.121
SENSOR_2: J13.115 J16.1
SENSOR_5: J13.112 J17.1
SENSOR_D: J13.82 J20.1
SHARED_VB: J11.04 U12.6
SHARED_VD: J11.08 U14.6
SNFET_1_VD: J13.145 U8.13
SNFET_2_VD: U8.14
SNFET_3_VD: J13.142 U8.15
SNFET_4_VD: U8.12
SNFET_5_VB: J13.138 U10.11
SNFET_5_VD: J13.137 U8.1
SNFET_5_VS: J13.136 U9.11
SNFET_SHARED_VB: J13.146 U10.10
SNFET_SHARED_VS: U9.10
SPFET_1_VB: J13.139 U10.4
SPFET_1_VD: J13.135 U8.5
SPFET_1_VS: J13.224 U9.4
SPFET_2_VB: J13.140 U10.5
SPFET_2_VD: J13.134 U8.2
SPFET_2_VS: J13.225 U9.5
T_VRPS_12_INT: R11.2 TP9.TP U36.6 U38.5 U39.5
T_VRPS_56_INT: R12.2 TP10.TP U40.6 U42.5 U43.5
T_VRPS_C_12: J13.120 U39.6
T_VRPS_C_12_EXT: J5.04 U39.4
T_VRPS_C_56: J13.111 U43.6
T_VRPS_C_56_EXT: J6.04 U43.4
T_VRPS_C_D: J13.78 U47.6
T_VRPS_C_D_EXT: J7.04 U47.4
T_VRPS_C_SHARED: J8.01 U39.11 U43.11 U47.11
T_VRPS_D_INT: R14.2 TP11.TP U44.6 U46.5 U47.5
T_VRPS_M_12: J13.118 U38.6
T_VRPS_M_12_EXT: J5.02 U38.4
T_VRPS_M_56: J13.109 U42.6
T_VRPS_M_56_EXT: J6.02 U42.4
T_VRPS_M_D: J13.69 U46.6
T_VRPS_M_D_EXT: J7.02 U46.4
T_VRPS_M_SHARED: J8.03 U38.11 U42.11 U46.11
TCK: J14.7 U48.24
TDI: J14.3 U48.22
TDO: J14.1 U48.21
TEST: J14.8 U48.17(TEST/SBWTCK)
TEST_EN_D: J13.75
TIA_C_OUT_BUF: J12.04 J13.74
TIA_M_OUT_BUF: J12.06 J13.73
TMS: J14.5 U48.23
VB: J10.06 U10.6
VD: J10.02 U8.3
VRPS_12: J13.117 U36.3 U37.6
VRPS_12_EXT: J5.06 U37.7
VRPS_56: J13.163 U40.3 U41.6
VRPS_56_EXT: J6.06 U41.7
VRPS_D: J13.70 U44.3 U45.6
VRPS_D_EXT: J7.06 U45.7
VRPS_SHARED: J9.01 U37.5 U41.5 U45.5
VS: J10.04 U9.6
VSN: J11.06 U13.6
VSP: J11.02 U11.6
XIN: C8.1 U48.13 X1.2
XOUT: C7.1 U48.12 X1.1
N27284: C23.1 U3.6
N27530: R9.1 U4.1
N27546: C26.1 U4.6
N27570: C26.2 U4.5
N27682: C29.1 U5.3
N27710: C29.2 U5.4
N66840: R10.2 U36.2
N67476: R13.2 U40.2
N68112: R15.2 U44.2
N93788: R16.1 R17.2 U6.4
N134590: R18.1 R19.2 U7.4(SET)
N162422: J13.132

Pads without a net: J1 S1 S2; J5 S1 S2; J6 S1 S2; J7 S1 S2; J8 S1 S2; J9 S1 S2; J10 S1 S2; J12 S1 S2; J13 1 3 4 5 6 7 8 10 11 12 13 14 15 16 17 18 19 20 21 22 23 24 26 27 28 29 30 31 32 33 34 35 36 37 38 39 40 41 42 43 44 45 46 47 48 49 50 51 52 53 54 55 56 57 58 59 60 61 62 63 65 68 85 86 87 88 89 90 91 92 93 94 95 96 98 99 100 101 102 103 104 105 106 107 133 141 147 154 155 156 166 167 168 169 170 171 172 173 174 175 176 177 178 179 180 181 182 183 184 185 186 187 188 189 190 191 192 193 194 195 196 197 198 199 200 201 202 203 204 205 206 207 208 209 210 211 212 213 214 215 216 217 219 220 221 222 223 226 A1 A2 A3 A4 A5 A6 A7 A8 A9 A10 A11 A12 A13 A14 A15 A16 A17 A18 A19 A20 A21 A22 A23 A24 A25 A26 A27 A28 A29 A30 A31 A32 A33 A34 A35 A36 A37 A38 A39; J14 2 6 10 12 13 14; U2 7 8 9; U4 8; U8 4; U9 7 8 9; U10 7 8 9; U36 1 5 8; U38 7 8 9 10; U39 7 8 9 10; U40 1 5 8; U42 7 8 9 10; U43 7 8 9 10; U44 1 5 8; U46 7 8 9 10; U47 7 8 9 10; U48 1 2

## Via types
v1: diameter 0.5, hole 0.2, TOP to BOTTOM, 147 vias
v2: diameter 0.5, hole 0.2, TOP to TRACE, 126 vias
v3: diameter 0.5, hole 0.2, TRACE to BOTTOM, 7 vias
v4: diameter 0.5, hole 0.2, TOP to GND, 59 vias
v5: diameter 0.5, hole 0.2, GND to BOTTOM, 13 vias

## Routing (per net, layer and track width the routed paths; a pad name or vN(x,y) marks a point on that pad's centre or on a via; arc(x,y) is an arc through that point)
3.3V: length 12.4
  TOP w0.1: C104.2 v2(28.87,83.16) C105.2 ; U48.15 v2(25.87,80.28) ; R7.1 v2(23.93,84.81)
  BOTTOM w0.1: 27.38,84.92 v3(27.93,85.47) ; 27.38,84.92 26.93,84.92 ; 27.38,84.92 27.88,84.92 28.99,83.82 ; 28.65,83.66 28.82,83.66 28.99,83.82 ; 28.65,83.66 U3.2 ; 28.65,83.66 27.38,82.38 26.93,82.38 ; 28.99,83.82 C22.1
5V_UNREGULATED: length 27.5
  BOTTOM w0.1: U4.7 40.1,77.63 40.75,76.98 U4.3 42.6,76.98 43.85,75.73 C24.1 ; U6.3 27.29,66.83 26.75,67.37 26.75,68.19 27.29,68.73 U6.1 27.9,69.29 27.12,70.07 C98.1 ; C21.1 19.85,85.02 19.95,84.92 21.49,84.92 U3.7 21.94,83.66 22.47,83.13 22.47,81.64 21.94,81.12 U3.5 ; U5.1 U5.6 40.29,86.71 C27.1
+1.65V: length 26.9
  TOP w0.1: U31.5 v2(49.03,26.44) ; U17.5 v2(105.54,22.62) ; U30.5 v2(72.52,22.62) ; U22.5 v2(59.54,46.19) ; U15.5 v2(72.52,31.51) ; U33.5 v2(83.95,22.62) ; 95.04,49.29 v2(96.02,49.29) ; U34.5 v2(49.04,44.19) ; U23.5 v2(89.67,56.91) ; U2.10 v2(74.34,47.28) ; U32.5 v2(49.03,35.32) ; U27.5 v2(59.54,54.69) ; U16.5 v2(59.54,63.19) ; U25.5 v2(37.6,34.69) ; U28.5 v2(94.75,22.62) ; U18.5 v2(78.24,55.01) ; U26.5 v2(60.46,26.44) ; U35.5 v2(37.54,44.19) ; U29.5 v2(60.46,35.32) ; U20.5 v2(94.11,32.15) ; U21.5 v2(74.54,78.69) ; U24.5 v2(89.67,65.81)
  BOTTOM w0.1: R16.2 v3(24.32,68.73) U6.5 25.6,69.29 24.75,70.14 C99.1
+5V: length 179.6
  TOP w0.1: 53.54,100.48 53.54,101.13 ; 53.54,101.13 C96.1 ; 53.54,101.13 v2(54.53,101.13) ; v2(132.8,17.59) 132.8,18.56 131.81,18.56 131.63,18.73 U42.12 127.87,18.73 127.21,19.38 124.76,19.38 ; 26.82,98.62 27.47,98.62 ; 27.47,98.62 v2(27.47,97.63) ; 27.47,98.62 C90.1 ; 34.04,45.48 34.04,46.13 ; 34.04,46.13 v2(35.03,46.13) ; 34.04,46.13 C64.1 ; U33.2 U33.1 ; U33.1 v2(81.44,24.57) ; U33.1 C60.1 ; 56.04,48.13 v2(57.03,48.13) ; 56.04,48.13 C44.1 ; 56.04,48.13 56.04,47.48 ; 35.8,98.62 v2(35.8,97.63) ; 35.8,98.62 35.15,98.62 ; 35.8,98.62 C92.1 ; C88.2 v2(73.55,96.87) U8.16 ; 56.04,55.98 56.04,56.63 ; 56.04,56.63 C15.1 ; 56.04,56.63 v2(57.03,56.63) ; C81.1 U45.1 ; U45.1 U45.2 ; U45.1 v2(86.3,75.23) ; U46.2 102.18,87.19 102.82,86.54 U46.12 106,86.54 106.19,86.36 C78.2 v2(107.17,85.4) ; C42.1 U21.1 ; U21.1 v2(72.03,80.63) ; U21.1 U21.2 ; C38.1 U19.1 ; U19.1 v2(93.51,51.25) ; U19.1 U19.2 ; U28.1 v2(92.24,24.57) ; U28.1 C17.1 ; U28.1 U28.2 ; C66.1 U37.1 ; U37.1 U37.2 ; U37.1 v2(111.45,43.83) ; U41.2 U41.1 ; U41.1 v2(111.92,7.43) ; U41.1 C75.1 ; C30.1 U23.1 ; U23.1 v2(87.16,58.87) ; U23.1 86.18,58.22 ; C84.2 v2(34.37,22.67) ; v2(108.9,64.7) C70.2 107.94,63.72 107.76,63.54 107.76,59.78 107.12,59.12 U39.2 ; U10.2 v2(65.34,98.53) ; 45.54,46.13 v2(46.53,46.13) ; 45.54,46.13 45.54,45.48 ; 45.54,46.13 C62.1 ; 56.97,37.28 v2(57.95,37.28) ; 56.97,37.28 C19.1 ; 56.97,37.28 U29.2 ; U47.2 102.18,79.57 102.82,78.92 U47.12 106,78.92 106.19,78.74 C80.2 v2(107.17,77.78) ; 45.53,37.28 v2(46.52,37.28) ; 45.53,37.28 C58.1 ; 45.53,37.28 U32.2 ; C32.1 U24.1 ; U24.1 v2(87.16,67.75) ; U24.1 U24.2 ; U20.1 v2(91.6,34.1) ; U20.1 C40.1 ; U20.1 U20.2 ; U36.7 v2(105.13,45.94) ; C50.1 U17.1 ; U17.1 v2(103.03,24.57) ; U17.1 U17.2 ; U18.2 U18.1 ; U18.1 C52.1 ; U18.1 v2(75.73,56.96) ; U26.2 U26.1 ; U26.1 v2(57.95,28.38) ; U26.1 C36.1 ; 34.1,35.99 34.1,36.64 ; 34.1,36.64 v2(35.09,36.64) ; 34.1,36.64 C34.1 ; 124.76,11.76 127.21,11.76 127.87,11.12 U43.12 131.63,11.12 131.81,10.94 132.8,10.94 v2(132.8,9.97) 132.81,10 133.43,10 ; C56.1 U31.1 ; U31.1 U31.2 ; U31.1 v2(46.52,28.38) ; v2(70.01,33.47) U15.1 U15.2 ; C100.2 v2(77.55,47.44) ; 56.04,65.13 v2(57.03,65.13) ; 56.04,65.13 C48.1 ; 56.04,65.13 56.04,64.48 ; U30.2 U30.1 ; U30.1 v2(70.01,24.57) ; U30.1 67.08,24.57 ; C94.1 43.97,98.62 ; 43.97,98.62 v2(43.97,97.63) ; 43.97,98.62 43.32,98.62 ; U10.12 64.69,92.75 64.51,92.56 C86.2 v2(63.55,91.58) ; U9.2 29.38,24.47 30.03,23.81 U9.12 ; U38.2 99.5,59.12 100.14,59.78 100.14,63.54 100.32,63.72 C69.2 v2(101.29,64.7) ; U44.7 v2(88.4,81.55) ; U40.7 v2(114.03,13.75)
  BOTTOM w0.1: R9.2 v3(43.85,80.81) C25.1 43.18,77.63 U4.2
-1.65V: length 40
  TOP w0.1: U34.7 v2(49.04,45.48) ; R6.2 v2(69.5,66.42) ; v2(69.5,66.42) 68.86,66.42 67.9,65.46 R5.2 ; v2(69.5,66.42) 70.14,66.42 71.1,65.46 R4.2 ; v2(69.5,66.42) TP2.TP ; U25.7 v2(37.6,35.99) ; U21.7 v2(74.54,79.98) ; U16.7 v2(59.54,64.48) ; U20.7 v2(94.11,33.45) ; U17.7 v2(105.54,23.92) ; 95.04,50.59 v2(96.02,50.59) ; U24.7 v2(89.67,67.1) ; U32.7 v2(49.03,36.62) ; U29.7 v2(60.46,36.62) ; U22.7 v2(59.54,47.48) ; U31.7 v2(49.03,27.73) ; U33.7 v2(83.95,23.92) ; U26.7 v2(60.46,27.73) ; U28.7 v2(94.75,23.92) ; 88.69,58.22 v2(89.67,58.22) ; U15.7 v2(72.52,32.81) ; U35.7 v2(37.54,45.48) ; U30.7 v2(72.52,23.92) ; U18.7 v2(78.24,56.31) ; U27.7 v2(59.54,55.98)
  BOTTOM w0.1: C108.1 U7.5 v3(35.31,66.82) R18.2 ; VR4.3 v3(47.59,51.63)
-5V: length 118.9
  TOP w0.1: U45.4 84.95,73.28 84.23,72.56 C82.2 ; 67.08,30.79 68.13,30.79 68.2,30.72 68.36,30.72 68.53,30.9 v2(69.03,30.9) U15.4 ; v2(101.05,86.54) U46.3 98.19,86.54 98.01,86.36 C79.1 ; 42.03,98.62 v2(41.41,98.62) 41.41,99.12 41.3,99.22 C95.2 ; U40.4 v2(110.46,10.55) ; C91.2 24.8,99.22 24.91,99.12 v2(24.91,98.62) 25.53,98.62 ; U9.3 25.39,23.81 25.21,23.63 C85.1 v1(23.03,23.63) ; C57.2 44.93,25.71 45.03,25.82 v2(45.53,25.82) U31.4 ; C33.2 85.57,65.08 85.68,65.19 v2(86.18,65.19) U24.4 ; C53.2 74.14,54.28 74.25,54.39 v2(74.75,54.39) U18.4 ; 33.85,98.62 v2(33.23,98.62) 33.23,99.12 33.12,99.22 C93.2 ; C68.1 100.32,55.54 100.14,55.72 v2(100.14,58.25) ; C67.2 114.12,41.76 113.4,42.48 U37.4 v2(114.02,42.85) ; C37.2 56.36,25.71 56.47,25.82 v2(56.97,25.82) U26.4 ; v2(126.44,11.12) U43.3 123.81,11.12 123.63,10.94 122.63,10.94 ; C16.2 55.44,53.96 55.54,54.07 v2(56.04,54.07) 56.04,54.69 ; U33.4 v2(80.46,22.01) ; U32.4 v2(45.53,34.71) 45.03,34.71 44.93,34.6 C59.2 ; U44.4 v2(84.84,78.35) ; v2(78.37,101.32) U8.7 U8.6 80.4,100.67 80.7,100.37 C89.1 ; C63.2 44.94,43.46 45.04,43.57 v2(45.54,43.57) 45.54,44.19 ; C76.2 109.85,4.75 110.57,5.48 U41.4 v2(110.94,4.86) ; v1(66.2,48.4) C101.1 68.39,48.4 68.57,48.58 U2.3 ; C35.2 33.5,33.97 33.6,34.07 v2(34.1,34.07) 34.1,34.69 ; C49.2 55.44,62.46 55.54,62.57 v2(56.04,62.57) 56.04,63.19 ; 56.04,46.19 v2(56.04,45.57) 55.54,45.57 55.44,45.46 C45.2 ; C83.1 98.01,78.74 98.19,78.92 U47.3 v2(101.05,78.92) ; C43.2 70.44,77.96 70.55,78.07 v2(71.05,78.07) U21.4 ; 34.04,44.19 v2(34.04,43.57) 33.54,43.57 33.44,43.46 C65.2 ; 122.63,18.56 123.63,18.56 123.81,18.73 U42.3 v2(126.44,18.73) ; 107.68,42.37 v2(108.33,42.37) ; 67.08,21.9 68.42,21.9 68.53,22.01 v2(69.03,22.01) U30.4 ; 53.54,99.19 v2(53.54,98.57) 53.04,98.57 52.94,98.46 C97.2 ; C31.2 85.57,56.19 85.68,56.3 v2(86.18,56.3) U23.4 ; C41.2 90.01,31.42 90.12,31.53 v2(90.62,31.53) U20.4 ; C18.2 90.65,21.9 90.75,22.01 v2(91.25,22.01) U28.4 ; C51.2 101.44,21.9 101.55,22.01 v2(102.05,22.01) U17.4 ; v1(64.51,102.92) C87.1 64.51,100.74 64.69,100.56 U10.3 ; C39.2 91.92,48.57 92.02,48.68 v2(92.52,48.68) U19.4 ; U29.4 v2(56.97,34.71) 56.47,34.71 56.36,34.6 C20.2 ; C71.1 107.94,55.54 107.76,55.72 v2(107.76,58.25)
  BOTTOM w0.1: 38.91,64.92 U7.2 ; 38.91,64.92 v3(38.04,64.92) ; 38.91,64.92 39.65,64.92 39.73,64.84 40.73,64.84 41.03,65.14 41.03,65.2 C109.1 ; U5.2 35.44,87.66 35.25,87.86 C28.1 v3(34.07,86.9)
GND: length 253.5
  TOP w0.1: U33.3 v4(76.92,23.28) ; v4(76.92,23.28) 76.92,21.9 ; v4(76.92,23.28) 76.92,24.57 ; U20.3 v4(87.07,32.8) ; v4(87.07,32.8) C41.1 ; v4(87.07,32.8) C40.2 ; C84.1 v4(34.37,26.19) ; U28.3 v4(87.71,23.28) ; v4(87.71,23.28) C17.2 ; v4(87.71,23.28) C18.1 ; C35.1 v4(30.56,35.34) ; v4(30.56,35.34) 34.1,35.34 ; v4(30.56,35.34) C34.2 ; C36.2 v4(53.42,27.09) ; v4(53.42,27.09) U26.3 ; v4(53.42,27.09) C37.1 ; U38.13 99.5,63.71 98.73,64.48 C69.1 v4(97.76,64.7) ; C76.1 v4(107.39,6.13) ; v4(107.39,6.13) U41.3 ; v4(107.39,6.13) C75.2 ; C50.2 v4(98.5,23.28) ; v4(98.5,23.28) U17.3 ; v4(98.5,23.28) C51.1 ; U23.3 v4(82.63,57.56) ; v4(82.63,57.56) C30.2 ; v4(82.63,57.56) C31.1 ; C8.2 v4(38.84,71.72) ; U24.3 v4(82.63,66.45) ; v4(82.63,66.45) C33.1 ; v4(82.63,66.45) C32.2 ; C79.2 v4(97.01,88.92) ; C58.2 v4(41.99,35.97) ; v4(41.99,35.97) C59.1 ; v4(41.99,35.97) U32.3 ; C53.1 v4(71.2,55.66) ; v4(71.2,55.66) C52.2 ; v4(71.2,55.66) U18.3 ; 42.68,98.62 v4(42.68,102.16) ; v4(42.68,102.16) C95.1 ; v4(42.68,102.16) C94.2 ; 56.04,46.84 v4(52.5,46.84) ; v4(52.5,46.84) C44.2 ; v4(52.5,46.84) C45.1 ; C92.2 v4(34.5,102.16) ; v4(34.5,102.16) C93.1 ; v4(34.5,102.16) 34.5,98.62 ; C48.2 v4(52.5,63.84) ; v4(52.5,63.84) C49.1 ; v4(52.5,63.84) 56.04,63.84 ; C83.2 v4(97.01,81.3) ; 92.52,49.94 v4(88.98,49.94) ; v4(88.98,49.94) C38.2 ; v4(88.98,49.94) C39.1 ; R10.1 v4(108.68,39.84) ; C68.2 v4(97.76,54.54) ; C19.2 v4(53.42,35.97) ; v4(53.42,35.97) C20.1 ; v4(53.42,35.97) U29.3 ; C105.1 C104.1 v4(26.37,81.56) U48.14 ; R11.1 v4(102.86,49.84) ; C46.2 v4(65.49,32.16) ; v4(65.49,32.16) C47.1 ; v4(65.49,32.16) 69.03,32.16 ; U31.3 v4(41.99,27.09) ; v4(41.99,27.09) C56.2 ; v4(41.99,27.09) C57.1 ; C67.1 v4(112.75,39.31) ; v4(112.75,39.31) C66.2 ; v4(112.75,39.31) U37.3 ; v4(132.8,13.5) C74.1 132.57,12.53 131.8,11.76 130.67,11.76 ; 26.18,98.62 v4(26.18,102.16) ; v4(26.18,102.16) C90.2 ; v4(26.18,102.16) C91.1 ; C15.2 v4(52.5,55.34) ; v4(52.5,55.34) 56.04,55.34 ; v4(52.5,55.34) C16.1 ; C7.2 v4(38.84,79.34) ; C97.1 v4(50,99.84) ; v4(50,99.84) 53.54,99.84 ; v4(50,99.84) C96.2 ; C85.2 v4(24.21,26.19) ; U39.13 107.12,63.71 106.35,64.48 C70.1 v4(105.38,64.7) ; U10.13 v4(65.34,94.79) ; C42.2 v4(67.5,79.34) ; v4(67.5,79.34) U21.3 ; v4(67.5,79.34) C43.1 ; C89.2 v4(80.53,101.97) U8.8 ; R12.1 v4(117.93,16.02) ; C4.1 v4(21.75,84.66) ; C71.2 v4(105.38,54.54) ; C100.1 v4(77.55,50.96) ; C81.2 v4(81.77,73.94) ; v4(81.77,73.94) U45.3 ; v4(81.77,73.94) C82.1 ; U46.13 106.18,87.19 106.94,87.96 C78.1 v4(107.17,88.92) ; R15.1 v4(82.3,78) ; C65.1 v4(30.5,44.84) ; v4(30.5,44.84) C64.2 ; v4(30.5,44.84) 34.04,44.84 ; C63.1 v4(42,44.84) ; v4(42,44.84) C62.2 ; v4(42,44.84) 45.54,44.84 ; C77.2 v4(122.63,13.5) ; C101.2 v4(67.39,50.96) ; U47.13 106.18,79.57 106.94,80.34 C80.1 v4(107.17,81.3) ; v4(132.8,21.12) C72.1 132.57,20.16 131.8,19.38 130.67,19.38 ; U30.3 v4(65.49,23.28) ; v4(65.49,23.28) C54.2 ; v4(65.49,23.28) C55.1 ; R13.1 v4(107.93,10.2) ; C88.1 v4(76.11,95.43) ; C73.2 v4(122.63,21.12) ; C87.2 v4(67.07,101.74) ; R14.1 v4(92.3,83.82) ; C86.1 v4(67.07,91.58)
  BOTTOM w0.1: U4.4 v5(40.62,76.33) ; C23.2 v5(17.41,82.99) C21.2 ; C98.2 v5(25.94,72.58) C99.2 ; J15.2 v5(10.31,107.72) ; C25.2 v5(45.45,76.34) C24.2 ; C22.2 v5(29.21,81.12) U3.4 26.48,81.12 25.9,81.7 25.53,81.7 U3.9 ; C108.2 v5(38.74,68.96) ; U7.1 v5(39.78,66.82) 41.05,66.82 ; R17.1 v5(28.66,64.78) ; U6.2 v5(29.18,67.78) ; C28.2 v5(34.07,90.42) ; R19.1 v5(39.46,61.88) ; U5.5 v5(39.75,87.66)
BOTTOM_PLANE: length 41.3
  TOP w0.1: U2.6 v1(70.6,46.63) ; J13.144 73.74,11.33 v1(73.74,14.44)
  BOTTOM w0.1: v1(73.74,14.44) 73.74,15 72.84,15.9 72.84,35.98 73.74,36.88 73.74,44.28 71.39,46.63 v1(70.6,46.63)
CH_EN_1_SEL: length 1.7
  TOP w0.1: U23.8 v1(88.69,59.48) ; U48.53 v1(31.37,70.52)
CH_EN_2_SEL: length 2.7
  TOP w0.1: U48.54 v1(31.87,69.55) ; U24.8 v1(88.69,68.37)
CH_EN_5_SEL: length 1.7
  TOP w0.1: U48.55 v1(32.37,70.52) ; U25.8 v1(36.62,37.26)
CH_EN_D_SEL: length 2.7
  TOP w0.1: U26.8 v1(59.47,29) ; U48.56 v1(32.87,69.55)
CH_OUTPUT_1: length 51.4
  BOTTOM w0.1: J13.124 91.27,8.5 92.03,9.26 92.66,9.26 94.26,7.66 97.35,7.66 127.35,37.66 J1.01
CH_OUTPUT_2: length 28.7
  BOTTOM w0.1: J13.2 12.84,3.1 9.5,6.43 9.5,6.76 9.48,6.78 9.48,7.85 9.5,7.87 J18.1
CH_OUTPUT_5: length 80
  TOP w0.1: J13.164 61.61,7.66 61.61,8.81 57.25,13.17 33.74,13.17 v1(33.1,13.81)
  BOTTOM w0.1: J19.1 19.13,51.91 25.48,45.56 25.48,34.12 33.1,26.5 v1(33.1,13.81)
CH_OUTPUT_D: length 292.2
  BOTTOM w0.1: J13.71 65.58,1.1 11.51,1.1 3.25,9.36 3.25,109.06 9.6,115.41 116.29,115.41 121.37,110.32 J21.1
CM: length 140.2
  BOTTOM w0.1: SW1.1 111.2,33.49 101.6,43.1 101.6,56.26 101.68,56.35 107.39,56.35 108.67,55.08 109.9,55.08 110.21,55.39 110.21,55.81 109.07,56.95 99.42,56.95 87.85,45.38 J13.127 87.85,7.97 87.08,7.21 87.08,6.5 87.48,6.11 87.48,5.48 87.08,5.09 87.08,3.51 85.91,2.34 85.28,2.34 85.27,2.35 85.19,2.35 84.78,2.76 84.16,2.76 83.74,2.34 82.95,2.34 82.53,2.76 81.91,2.76 81.49,2.34 80.7,2.34 80.28,2.76 79.66,2.76 79.24,2.34 78.45,2.34 77.69,3.1 J13.84 76.6,2.47 76.5,2.38 76.17,2.38 75.78,2.76 75.08,2.76 74.66,2.34 74.03,2.34 73.61,2.76 72.91,2.76 72.52,2.38 72.45,2.38 72.41,2.34 71.78,2.34 70.26,3.86 62.74,3.86 62.33,4.26 62.33,5.09 63.1,5.85 J13.161
CM_EXT: length 26.9
  BOTTOM w0.1: SW1.3 130.69,48.53 J9.03
COND_EN_1_SEL: length 1.7
  TOP w0.1: U48.49 v1(29.37,70.52) ; 95.04,51.25 v1(95.04,51.86)
COND_EN_2_SEL: length 2.7
  TOP w0.1: U48.50 v1(29.87,69.55) ; U20.8 v1(93.13,34.72)
COND_EN_5_SEL: length 1.7
  TOP w0.1: U21.8 v1(73.56,81.25) ; U48.51 v1(30.37,70.52)
COND_EN_D_SEL: length 2.7
  TOP w0.1: U22.8 v1(58.56,48.75) ; U48.52 v1(30.87,69.55)
DIFF_NFET_1_SHARED_VB: length 117.3
  TOP w0.1: J13.152 69,7.74 67.18,7.74 65.66,9.26 65.63,9.26 60.58,14.31 59.56,14.31 59.06,13.81 v1(58.5,13.81) ; U12.7 v1(35.15,95.12)
  BOTTOM w0.1: v1(35.15,95.12) 40.68,95.12 41.99,93.81 52.15,93.81 53.42,92.54 53.42,16.34 55.96,13.81 v1(58.5,13.81)
DIFF_NFET_1_SHARED_VD: length 104.7
  TOP w0.1: U14.7 v1(57.04,100.48)
  BOTTOM w0.1: v1(57.04,100.48) 57.9,101.35 61.13,101.35 63.54,98.93 63.54,96.18 63.17,95.81 63.17,21.2 70.21,14.16 70.21,9.28 70.61,8.89 70.61,8.39 J13.149
DIFF_NFET_1_VSN: length 108.8
  TOP w0.1: v1(61.68,14.44) 62.31,14.44 63.08,13.67 66.9,13.67 J13.150 ; U13.7 v1(43.32,95.12)
  BOTTOM w0.1: v1(43.32,95.12) 55.92,95.12 59.13,91.91 59.13,38.26 58.97,38.1 58.97,15.87 59.77,15.07 61.04,15.07 v1(61.68,14.44)
DIFF_NFET_1_VSP: length 125.1
  TOP w0.1: v1(62.94,13.17) 63.58,13.17 66.12,10.63 68.76,10.63 69.85,9.54 J13.151 ; U11.7 v1(26.82,95.12)
  BOTTOM w0.1: v1(26.82,95.12) 29.25,95.12 31.19,93.18 51.51,93.18 52.15,92.54 52.15,16.34 55.32,13.17 v1(62.94,13.17)
DIFF_NFET_2_SHARED_VB: length 123.5
  TOP w0.1: U12.5 v1(33.85,95.12)
  BOTTOM w0.1: J13.153 68.72,14.38 62.87,20.23 62.87,98.1 61.29,99.69 56.12,99.69 54.69,98.26 45.8,98.26 43.9,96.35 35.08,96.35 v1(33.85,95.12)
DIFF_NFET_2_SHARED_VD: length 102.6
  TOP w0.1: J13.148 72.1,9.54 67.67,13.97 63.42,13.97 62.94,14.44 v1(62.94,15.07) ; U14.5 v1(57.04,99.19)
  BOTTOM w0.1: v1(62.94,15.07) 62.31,15.07 61.68,15.71 61.68,97.62 60.12,99.19 v1(57.04,99.19)
DIFF_NFET_2_VSN: length 111.4
  TOP w0.1: U13.5 v1(42.03,95.12) ; J13.66 63.86,3.86 63.86,5.01 63.46,5.41 63.46,6.11 63.86,6.5 63.86,7.21 63.58,7.48 63.58,7.91 63.86,8.18 63.86,8.89 63.46,9.28 63.46,10.12 v1(59.77,13.81)
  BOTTOM w0.1: v1(59.77,13.81) 59.13,14.44 57.23,14.44 55.24,16.43 55.24,79.5 55.32,79.58 55.32,94.35 55.22,94.45 42.7,94.45 v1(42.03,95.12)
DIFF_NFET_2_VSP: length 127.2
  TOP w0.1: U11.5 v1(25.53,95.12)
  BOTTOM w0.1: v1(25.53,95.12) 26.08,95.12 26.75,94.45 29.29,94.45 31.19,92.54 50.25,92.54 50.88,91.91 50.88,16.34 54.56,12.67 62.22,12.67 64.98,9.91 64.98,9.2 64.58,8.81 64.58,8.18 64.85,7.92 64.85,7.47 64.58,7.21 64.58,6.58 65.03,6.14 65.03,5.53 64.19,4.7 J13.67
HP_BYPASS_EN_1_SEL: length 1.7
  TOP w0.1: U15.8 v1(71.54,34.08) ; U48.45 v1(27.37,70.52)
HP_BYPASS_EN_2_SEL: length 2.7
  TOP w0.1: U16.8 v1(58.56,65.75) ; U48.46 v1(27.87,69.55)
HP_BYPASS_EN_5_SEL: length 1.7
  TOP w0.1: U48.47 v1(28.37,70.52) ; U17.8 v1(104.56,25.19)
HP_BYPASS_EN_D_SEL: length 2.7
  TOP w0.1: U18.8 v1(77.25,57.58) ; U48.48 v1(28.87,69.55)
HPF_OUT_BUF: length 187
  TOP w0.1: J13.72 68.78,4.28 69.19,4.28 69.53,3.94 70.16,3.94 70.5,4.28 71.44,4.28 71.78,3.94 72.41,3.94 72.75,4.28 73.69,4.28 74.03,3.94 74.66,3.94 75,4.28 75.94,4.28 76.28,3.94 77.01,3.94 80.33,7.26 80.33,8.81 80.73,9.2 80.73,11.26 76.28,15.71 v1(75.64,15.71)
  BOTTOM w0.1: v1(75.64,15.71) 75.01,15.71 74.71,16.01 74.71,36.15 77.88,39.32 77.88,98.77 76.92,99.73 76.92,105.67 84.11,112.87 98.5,112.87 102.95,108.42 102.95,106.51 115.65,93.81 J12.02
IREF_EN_12_SEL: length 1.1
  TOP w0.1: U48.11 v1(27.87,78.12)
IREF_EN_56_SEL: length 2.6
  TOP w0.1: U48.10 v1(28.37,77.17) ; U34.8 v1(48.06,46.75)
IREF_EN_D_SEL: length 2.6
  TOP w0.1: U35.8 v1(36.56,46.75) ; U48.25 v1(20.87,77.17)
IREF_REXT_D: length 14.8
  TOP w0.1: v1(73.74,47.93) U2.11
  BOTTOM w0.1: v1(73.74,47.93) 71.04,47.93 69.93,46.82 VR5.2 69.93,39.97 68.78,38.82 VR5.1
IREF_TEST_12_SEL: length 1.7
  TOP w0.1: U48.20 v1(23.37,78.12) ; U30.8 v1(71.54,25.19)
IREF_TEST_56_SEL: length 2.6
  TOP w0.1: U31.8 v1(48.04,29) ; U48.19 v1(23.87,77.17)
  vias: v1(90.59,59.26)
IREF_TEST_D_SEL: length 1.7
  TOP w0.1: 48.04,37.28 v1(48.04,37.89) ; U48.18 v1(24.37,78.12)
RST: length 25
  TOP w0.1: J14.11 14.71,74 22.44,74 25.37,76.91 U48.16 25.37,80.72 24.18,81.9 R7.2 22.94,81.9 22.74,82.1 C4.2
SEL1_0: length 2
  TOP w0.1: U48.40 v1(24.87,69.55)
SEL1_1: length 1.1
  TOP w0.1: U48.41 v1(25.37,70.52)
SEL1_2: length 2
  TOP w0.1: U48.42 v1(25.87,69.55)
SEL2_0: length 1.7
  TOP w0.1: 26.34,25.12 v1(26.34,25.72) ; U48.43 v1(26.37,70.52)
SEL2_1: length 2.7
  TOP w0.1: U48.44 v1(26.87,69.55) ; 32.24,25.12 v1(32.24,25.72)
SEL3: length 1.1
  TOP w0.1: U48.33 v1(21.37,70.52)
SEL4_0: length 1.1
  TOP w0.1: U48.9 v1(28.87,78.12)
SEL4_1: length 2
  TOP w0.1: U48.8 v1(29.37,77.17)
SEL5_0: length 1.1
  TOP w0.1: U48.7 v1(29.87,78.12)
SEL5_1: length 2
  TOP w0.1: U48.6 v1(30.37,77.17)
SEL6_0: length 1.1
  TOP w0.1: U48.29 v1(19.37,70.52)
SEL6_1: length 2
  TOP w0.1: U48.30 v1(19.87,69.55)
SEL7_0: length 1.1
  TOP w0.1: U48.31 v1(20.37,70.52)
SEL7_1: length 2
  TOP w0.1: U48.32 v1(20.87,69.55)
SEL8_0: length 2
  TOP w0.1: U48.36 v1(22.87,69.55)
SEL8_1: length 1.1
  TOP w0.1: U48.37 v1(23.37,70.52)
SEL9_0: length 2
  TOP w0.1: U48.38 v1(23.87,69.55)
SEL9_1: length 1.1
  TOP w0.1: U48.39 v1(24.37,70.52)
SEL10: length 1.1
  TOP w0.1: U48.5 v1(30.87,78.12)
SEL11: length 2
  TOP w0.1: U48.34 v1(21.87,69.55)
SEL12: length 1.1
  TOP w0.1: U48.35 v1(22.37,70.52)
SEL13: length 1.7
  TOP w0.1: U27.8 v1(58.56,57.25) ; U48.28 v1(19.37,78.12)
SEL14: length 2.6
  TOP w0.1: U48.27 v1(19.87,77.17) ; U28.8 v1(93.76,25.19)
SEL15: length 1.7
  TOP w0.1: 59.47,37.28 v1(59.47,37.89) ; U48.26 v1(20.37,78.12)
SEL16_0: length 3.5
  TOP w0.1: U2.1 v1(69.52,50.48) ; U48.4 31.37,80.38 v1(32.6,81.62)
SEL16_1: length 2.4
  TOP w0.1: U48.3 31.87,80.24 31.97,80.34 v1(32.6,80.34) ; U2.14 v1(75.42,50.48)
SENSOR_1: length 53.6
  BOTTOM w0.1: J1.03 130.11,37.13 130.11,36.54 103.1,9.53 102.62,9.53 102.15,9.06 102.15,8.56 100.15,6.56 97.66,6.56 97.24,6.14 96.53,6.14 96.48,6.19 96.4,6.19 96.03,6.56 95.41,6.56 95.04,6.19 94.96,6.19 94.91,6.14 94.28,6.14 93.83,6.58 93.83,7.01 J13.121
SENSOR_2: length 52.9
  BOTTOM w0.1: J13.115 96.85,11.93 112.84,27.93 112.84,33.22 124,44.38 J16.1
SENSOR_5: length 141.3
  TOP w0.1: v1(28.66,14.44) v1(29.93,15.71) 30.56,16.34 93.43,16.34 99.77,10 99.77,8.72 96.85,5.79 J13.112
  BOTTOM w0.1: v1(28.66,14.44) 28.29,14.81 28.29,26.87 17.22,37.94 4.62,37.94 4.53,38.03 4.53,46.82 9.5,51.8 J17.1
SENSOR_D: length 150.3
  TOP w0.1: v1(75.64,15.01) 78.48,12.17 78.48,9.2 78.08,8.81 78.08,7.31 75.47,4.7 J13.82
  BOTTOM w0.1: J20.1 110.57,110.32 106.76,114.13 84.54,114.13 76.61,106.21 76.61,99.61 77.42,98.81 77.42,58.44 76.75,57.78 76.75,57.37 77.58,56.55 77.58,39.45 73.74,35.61 73.74,16.27 75.01,15.01 v1(75.64,15.01)
SHARED_VB: length 13.5
  TOP w0.1: U12.6 v1(34.5,97.09)
  BOTTOM w0.1: J11.04 34.5,108.06 v1(34.5,97.09)
SHARED_VD: length 19.2
  TOP w0.1: U14.6 v1(55.07,99.84)
  BOTTOM w0.1: v1(55.07,99.84) 47.12,107.78 42.05,107.78 J11.08
SNFET_1_VD: length 93.3
  TOP w0.1: U8.13 v1(74.67,99.37)
  BOTTOM w0.1: J13.145 74.35,14.82 73.14,16.02 73.14,35.86 74.35,37.06 74.35,97.68 74.17,97.86 74.17,98.28 74.28,98.39 74.28,98.98 v1(74.67,99.37)
SNFET_3_VD: length 93.8
  TOP w0.1: U8.15 v1(74.67,98.07)
  BOTTOM w0.1: v1(74.67,98.07) 76.28,96.46 76.28,38.57 73.44,35.73 73.44,16.15 75.01,14.58 75.01,11.13 76.6,9.54 J13.142
SNFET_5_VB: length 101
  TOP w0.1: U10.11 64.04,94.44 v1(64.73,95.13)
  BOTTOM w0.1: J13.138 78.87,9.6 78.08,8.81 78.08,7.79 77.75,7.45 77.11,7.45 76.91,7.66 76.28,7.66 76.08,7.45 74.86,7.45 74.66,7.66 74.01,7.66 73.58,8.08 73.58,8.89 73.98,9.28 73.98,9.91 73.11,10.78 73.11,13.81 64.73,22.18 v1(64.73,95.13)
SNFET_5_VD: length 93.2
  TOP w0.1: U8.1 v1(79.45,96.87)
  BOTTOM w0.1: v1(79.45,96.87) 79.45,33.38 82.63,30.2 82.63,10.68 83.28,10.03 83.28,9.16 82.66,8.54 82.31,8.54 81.63,7.86 81.63,7.43 J13.137
SNFET_5_VS: length 63.1
  TOP w0.1: v1(77.55,16.98) v1(47.71,16.98) ; v1(33.86,21.55) 33.86,22.5 33.19,23.16 U9.11
  BOTTOM w0.1: v1(77.55,16.98) 77.55,14.69 81.88,10.36 82.53,10.36 82.98,9.91 82.98,9.28 82.53,8.84 81.91,8.84 81.46,9.28 81.46,9.83 81.36,9.93 81.12,9.93 81.02,9.83 81.02,9.7 81.1,9.62 J13.136 ; v1(33.86,21.55) 43.14,21.55 v1(47.71,16.98)
SNFET_SHARED_VB: length 95.6
  TOP w0.1: v1(64.21,95.72) 63.39,94.9 U10.10
  BOTTOM w0.1: v1(64.21,95.72) 64.21,22.06 72.46,13.81 72.46,10.33 72.16,10.03 72.16,9.5 72.86,8.81 72.86,8.39 J13.146
SPFET_1_VB: length 105.1
  TOP w0.1: U10.4 v1(64.04,98.26)
  BOTTOM w0.1: J13.139 78.85,8.07 76.91,6.14 76.28,6.14 75.86,6.56 75.08,6.56 74.66,6.14 74.03,6.14 72.43,7.74 71.78,7.74 71.33,8.18 71.33,8.81 71.83,9.31 71.83,13.81 63.92,21.72 63.92,95.31 63.71,95.51 63.71,95.93 64.04,96.25 v1(64.04,98.26)
SPFET_1_VD: length 95.6
  TOP w0.1: v1(78.19,100.02) U8.5
  BOTTOM w0.1: J13.135 76.75,15.07 76.75,16.17 76.13,16.78 76.13,35.79 78.87,38.53 78.87,99.33 v1(78.19,100.02)
SPFET_1_VS: length 22.8
  TOP w0.1: U9.4 v1(27.49,23.16)
  BOTTOM w0.1: J13.224 13.59,11.44 21.03,18.88 23.21,18.88 v1(27.49,23.16)
SPFET_2_VB: length 108.7
  TOP w0.1: U10.5 63.39,98.66 62.99,98.26 v1(62.01,98.26)
  BOTTOM w0.1: v1(62.01,98.26) 62.36,97.91 62.36,16.79 67.96,11.19 67.96,9.28 68.41,8.84 68.43,8.84 69.53,7.74 70.18,7.74 72.88,5.04 73.53,5.04 73.98,5.48 74.63,5.48 75.08,5.04 75.86,5.04 76.28,5.46 76.99,5.46 77.41,5.04 78.03,5.04 78.85,5.85 J13.140
SPFET_2_VD: length 95
  TOP w0.1: U8.2 v1(80.53,98.07)
  BOTTOM w0.1: v1(80.53,98.07) 80.53,32.72 82.93,30.32 82.93,12.23 84.83,10.33 84.83,10.31 85.23,9.91 85.23,9.28 83.9,7.95 83.9,7.45 J13.134
SPFET_2_VS: length 24.7
  TOP w0.1: v1(25.19,22.51) U9.5
  BOTTOM w0.1: v1(25.19,22.51) 22.76,22.51 11.51,11.26 11.51,8.98 J13.225
T_VRPS_12_INT: length 27.1
  TOP w0.1: 105.77,50.09 R11.2 106.4,49.2 106.4,48 ; 105.77,50.09 101.44,54.41 U38.5 ; 105.77,50.09 109.06,53.38 U39.5 ; U36.6 106.4,48 ; 106.4,48 110.31,51.91 TP9.TP
T_VRPS_56_INT: length 24.6
  TOP w0.1: 116.09,12.47 117.29,12.47 R12.2 118.18,13.11 ; 116.09,12.47 U40.6 ; 116.09,12.47 118.19,10.38 TP10.TP ; 118.18,13.11 122.5,17.44 U42.5 ; 118.18,13.11 121.47,9.81 U43.5
T_VRPS_C_12: length 60.1
  TOP w0.1: U39.6 v1(109.71,55.6)
  BOTTOM w0.1: v1(109.71,55.6) 108.66,56.65 101.56,56.65 100.41,55.5 100.41,18.88 93.47,11.94 J13.120
